# EAGLE board MicroMod_STM32_Processor-Panel (EAGLE 9.6.2), part 1 of 3
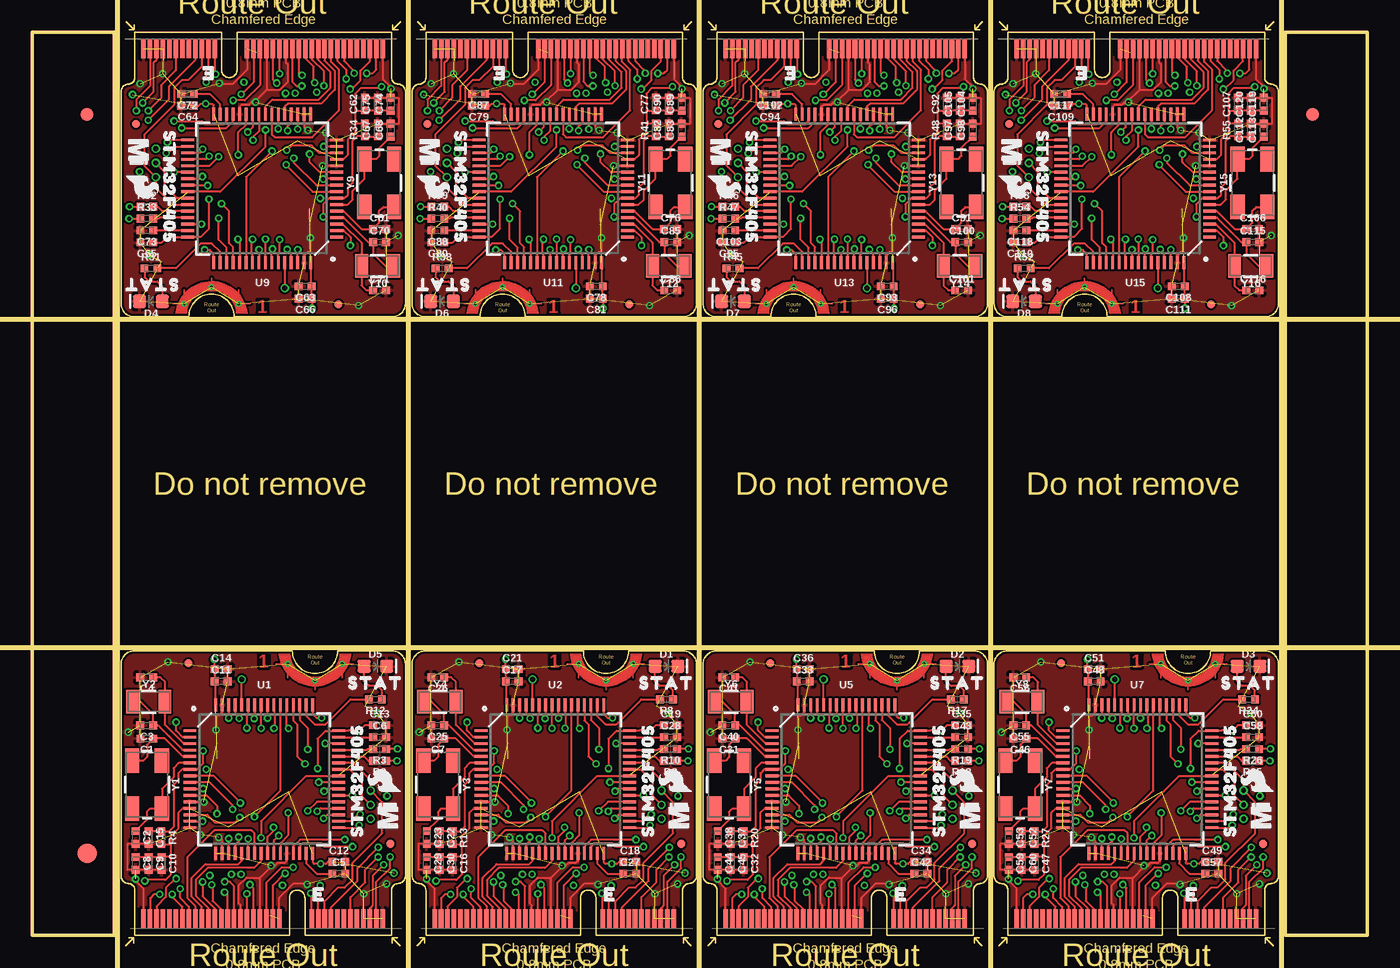
[diagram p0: board, top side]
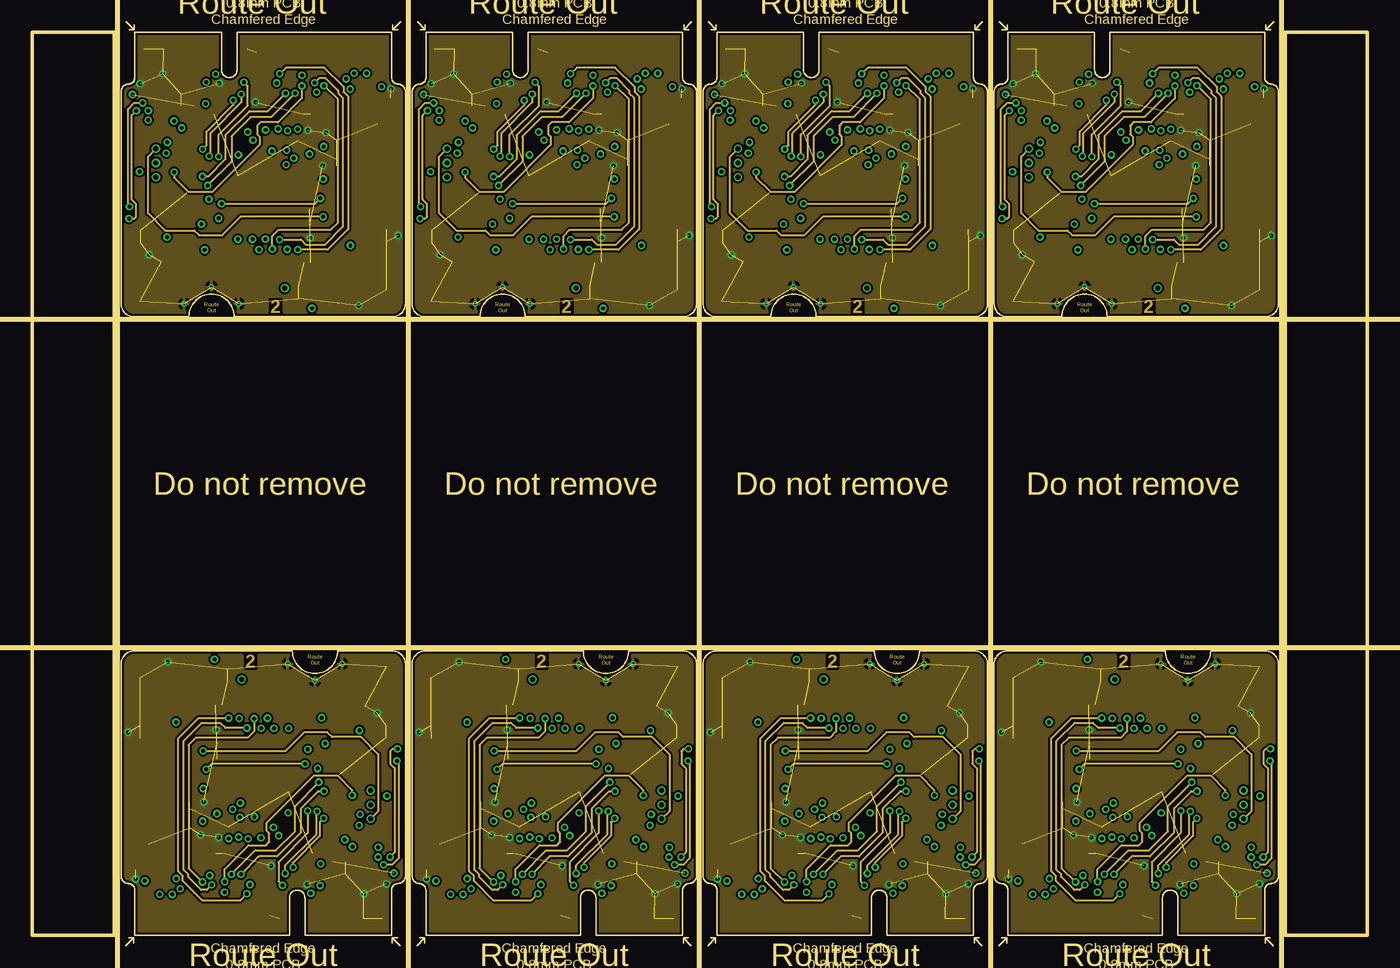
[diagram p1: board, inner layer Route2]
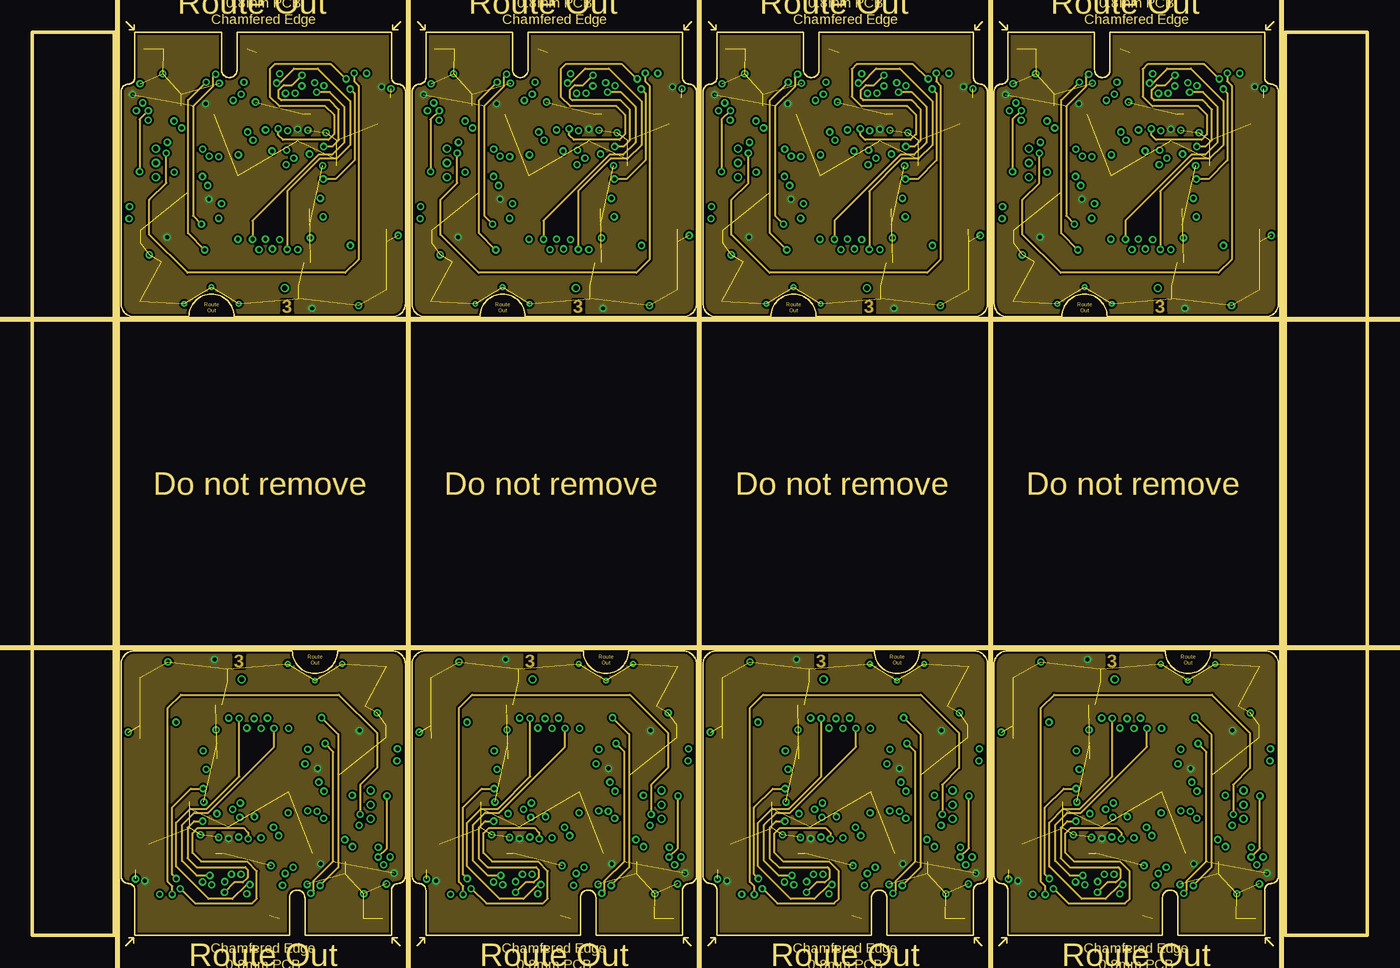
[diagram p2: board, inner layer Route15]
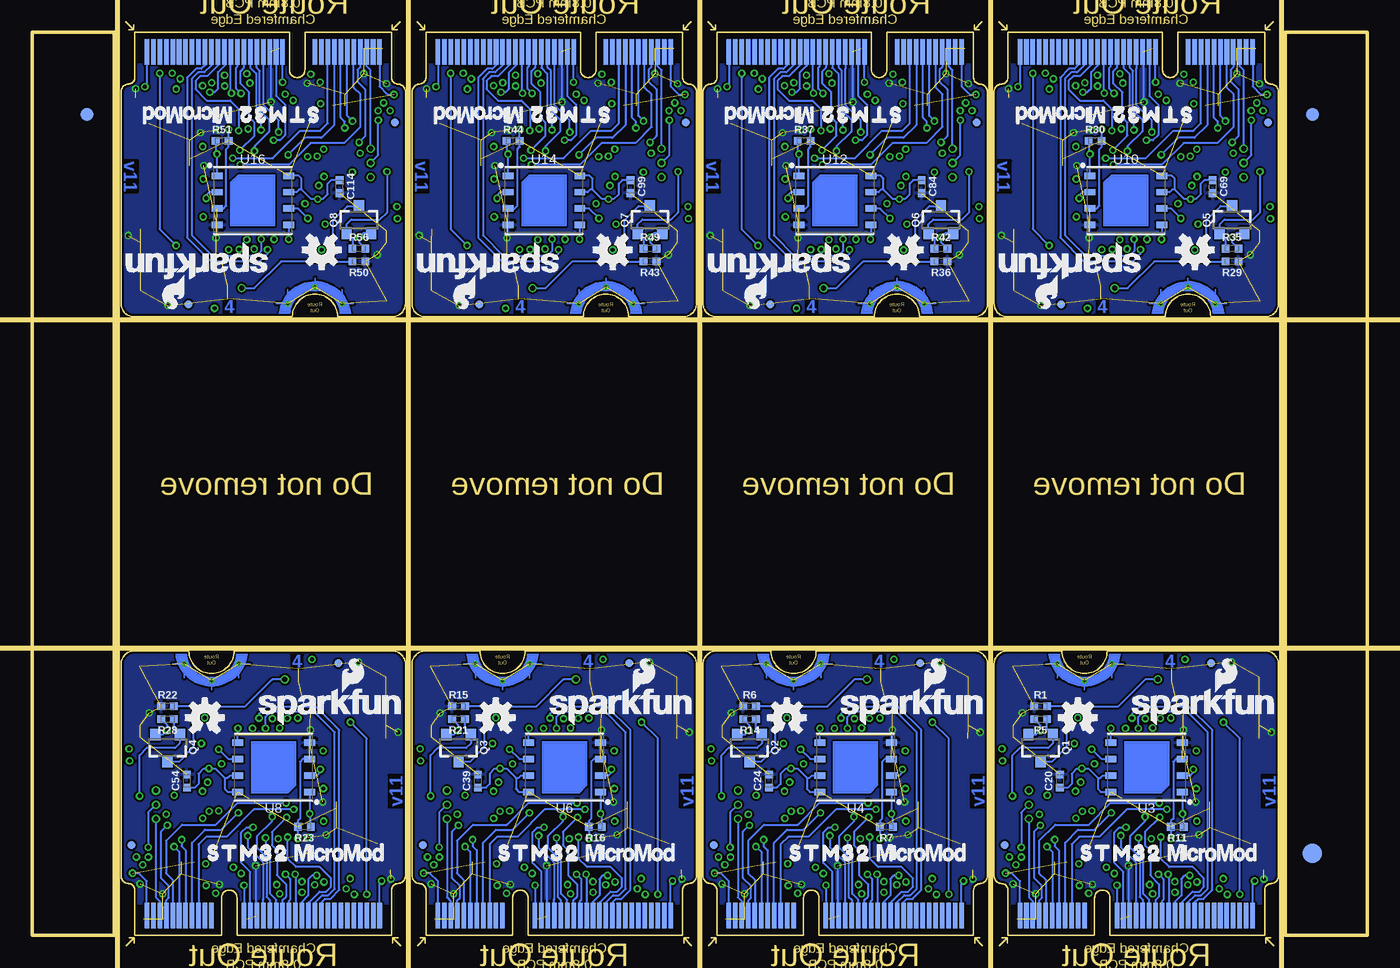
[diagram p3: board, bottom side, seen from below]

Size 103.24 x 69.85 mm. Coordinates in mm from the lower left corner, seen from the top.
Outline: 160 segments
Copper layers (1*2*15*16): Top 0.035559375mm / dielectric 0.47751875mm / Route2 0.035559375mm / dielectric 0.47751875mm / Route15 0.035559375mm / dielectric 0.47751875mm / Bottom 0.035559375mm
Design rules "MicroMod_STM32_Processor": minimum track width 4mil, minimum drill 6mil, track to track 5mil, track to pad 5mil, pad to pad 5mil, via to via 5mil, smd to smd 5mil, copper to edge 4mil, drill to drill 4mil, minimum pad ring 5mil, minimum via ring 5mil, stop-mask expansion 4mil, vias tented up to drill 25mil, thermal gap 10mil
tRestrict: area 11.4,10.3 to 11.6,10.5; area 13.9,6.3 to 14,6.4; area 13.8,7.1 to 13.9,7.5; area 33.9,10.3 to 34.1,10.5; area 36.4,6.3 to 36.5,6.4; area 36.3,7.1 to 36.4,7.5; area 56.4,10.3 to 56.6,10.5; area 58.9,6.3 to 59,6.4; area 58.8,7.1 to 58.9,7.5; area 78.9,10.3 to 79.1,10.5; area 81.4,6.3 to 81.5,6.4; area 81.3,7.1 to 81.4,7.5; 12 more areas
Milling: 7 lines

## Footprints (pad centres in the part's own frame; a part is rotated, then mirrored left to right if it is on the bottom)
0402-TIGHT = smd 0.6 x 0.6: 1 -0.5,0; 2 0.5,0
LED-0603 = smd 1 x 1: A -0.877,0; C 0.877,0
FIDUCIAL-1X2 = smd 1 x 1: 1 0,0
FIDUCIAL-1.5X3 = smd 1.5 x 1.5: 1 0,0
FIDUCIAL-MICRO = smd 0.635 x 0.635: 1 0,0
M.2-CARD-E-22 = smd 0.35 x 1.45: 1 9.25,1.275; 3 8.75,1.275; 5 8.25,1.275; 7 7.75,1.275; 9 7.25,1.275; 11 6.75,1.275; 13 6.25,1.275; 15 5.75,1.275; 17 5.25,1.275; 19 4.75,1.275; 21 4.25,1.275; 23 3.75,1.275; 33 1.25,1.275; 35 0.75,1.275; 37 0.25,1.275; 39 -0.25,1.275; 41 -0.75,1.275; 43 -1.25,1.275; 45 -1.75,1.275; 47 -2.25,1.275; 49 -2.75,1.275; 51 -3.25,1.275; 53 -3.75,1.275; 55 -4.25,1.275; 57 -4.75,1.275; 59 -5.25,1.275; 61 -5.75,1.275; 63 -6.25,1.275; 65 -6.75,1.275; 67 -7.25,1.275; 69 -7.75,1.275; 71 -8.25,1.275; 73 -8.75,1.275; 75 -9.25,1.275 | smd 0.35 x 1.95 bottom: 2 9,1.525; 4 8.5,1.525; 6 8,1.525; 8 7.5,1.525; 10 7,1.525; 12 6.5,1.525; 14 6,1.525; 16 5.5,1.525; 18 5,1.525; 20 4.5,1.525; 22 4,1.525; 32 1.5,1.525; 34 1,1.525; 36 0.5,1.525; 38 0,1.525; 40 -0.5,1.525; 42 -1,1.525; 44 -1.5,1.525; 46 -2,1.525; 48 -2.5,1.525; 50 -3,1.525; 52 -3.5,1.525; 54 -4,1.525; 56 -4.5,1.525; 58 -5,1.525; 60 -5.5,1.525; 62 -6,1.525; 64 -6.5,1.525; 66 -7,1.525; 68 -7.5,1.525; 70 -8,1.525; 72 -8.5,1.525; 74 -9,1.525 | drill 0.2: GND1 1.9,21; GND2 4,19.7; GND3 6.1,21
SOT23-3 = smd 0.8 x 0.9: 1 -0.95,-1; 2 0.95,-1; 3 0,1.1
TP_15TH = drill 0.381 pad 0.61: 1 0,0
TQFP64 = smd 0.22 x 1: 1 -3.75,-5.75; 2 -3.25,-5.75; 3 -2.75,-5.75; 4 -2.25,-5.75; 5 -1.75,-5.75; 6 -1.25,-5.75; 7 -0.75,-5.75; 8 -0.25,-5.75; 9 0.25,-5.75; 10 0.75,-5.75; 11 1.25,-5.75; 12 1.75,-5.75; 13 2.25,-5.75; 14 2.75,-5.75; 15 3.25,-5.75; 16 3.75,-5.75; 33 3.75,5.75; 34 3.25,5.75; 35 2.75,5.75; 36 2.25,5.75; 37 1.75,5.75; 38 1.25,5.75; 39 0.75,5.75; 40 0.25,5.75; 41 -0.25,5.75; 42 -0.75,5.75; 43 -1.25,5.75; 44 -1.75,5.75; 45 -2.25,5.75; 46 -2.75,5.75; 47 -3.25,5.75; 48 -3.75,5.75 | smd 1 x 0.22: 17 5.75,-3.75; 18 5.75,-3.25; 19 5.75,-2.75; 20 5.75,-2.25; 21 5.75,-1.75; 22 5.75,-1.25; 23 5.75,-0.75; 24 5.75,-0.25; 25 5.75,0.25; 26 5.75,0.75; 27 5.75,1.25; 28 5.75,1.75; 29 5.75,2.25; 30 5.75,2.75; 31 5.75,3.25; 32 5.75,3.75; 49 -5.75,3.75; 50 -5.75,3.25; 51 -5.75,2.75; 52 -5.75,2.25; 53 -5.75,1.75; 54 -5.75,1.25; 55 -5.75,0.75; 56 -5.75,0.25; 57 -5.75,-0.25; 58 -5.75,-0.75; 59 -5.75,-1.25; 60 -5.75,-1.75; 61 -5.75,-2.25; 62 -5.75,-2.75; 63 -5.75,-3.25; 64 -5.75,-3.75
WSON-8-6X5 = smd 0.85 x 0.5: 1 -2.775,1.905; 2 -2.775,0.635; 3 -2.775,-0.635; 4 -2.775,-1.905; 5 2.775,-1.905; 6 2.775,-0.635; 7 2.775,0.635; 8 2.775,1.905
CRYSTAL-SMD-5X3.2-4PAD = smd 1.9 x 1.1: 1 -1.85,-1.15; 2 1.85,-1.15; 3 1.85,1.15; 4 -1.85,1.15
CRYSTAL-SMD-3.2X1.5MM = smd 1 x 1.8: P$1 -1.25,0; P$2 1.25,0

## Placement (x,y rotation side)
C1  22pF  [0402-TIGHT]  8.86,15.22 180 top
C2  22pF  [0402-TIGHT]  8,7.57 270 top
C3  15pF  [0402-TIGHT]  8.85,16.23 180 top
C4  15pF  [0402-TIGHT]  8.85,19.95 180 top
C5  2.2uF  [0402-TIGHT]  23.71,4.77 0 top
C6  2.2uF  [0402-TIGHT]  26.86,15.33 0 top
C7  22pF  [0402-TIGHT]  31.36,15.22 180 top
C8  0.1uF  [0402-TIGHT]  8,5.56 270 top
C9  1.0uF  [0402-TIGHT]  9,5.56 270 top
C10  4.7uF  [0402-TIGHT]  10,5.55 270 top
C11  0.1uF  [0402-TIGHT]  14.61,19.65 0 top
C12  0.1uF  [0402-TIGHT]  23.71,5.68 0 top
C13  0.1uF  [0402-TIGHT]  26.86,16.25 0 top
C14  0.1uF  [0402-TIGHT]  14.61,20.59 0 top
C15  0.1uF  [0402-TIGHT]  9,7.56 270 top
C16  4.7uF  [0402-TIGHT]  32.5,5.55 270 top
C17  0.1uF  [0402-TIGHT]  37.11,19.65 0 top
C18  0.1uF  [0402-TIGHT]  46.21,5.68 0 top
C19  0.1uF  [0402-TIGHT]  49.36,16.25 0 top
C20  0.1uF  [0402-TIGHT]  23.76,11.93 90 bottom
C21  0.1uF  [0402-TIGHT]  37.11,20.59 0 top
C22  0.1uF  [0402-TIGHT]  31.5,7.56 270 top
C23  22pF  [0402-TIGHT]  30.5,7.57 270 top
C24  0.1uF  [0402-TIGHT]  46.27,11.93 90 bottom
C25  15pF  [0402-TIGHT]  31.35,16.23 180 top
C26  15pF  [0402-TIGHT]  31.35,19.95 180 top
C27  2.2uF  [0402-TIGHT]  46.21,4.77 0 top
C28  2.2uF  [0402-TIGHT]  49.36,15.33 0 top
C29  0.1uF  [0402-TIGHT]  30.5,5.56 270 top
C30  1.0uF  [0402-TIGHT]  31.5,5.56 270 top
C31  22pF  [0402-TIGHT]  53.87,15.22 180 top
C32  4.7uF  [0402-TIGHT]  55.01,5.55 270 top
C33  0.1uF  [0402-TIGHT]  59.62,19.65 0 top
C34  0.1uF  [0402-TIGHT]  68.72,5.68 0 top
C35  0.1uF  [0402-TIGHT]  71.87,16.25 0 top
C36  0.1uF  [0402-TIGHT]  59.62,20.59 0 top
C37  0.1uF  [0402-TIGHT]  54.01,7.56 270 top
C38  22pF  [0402-TIGHT]  53.01,7.57 270 top
C39  0.1uF  [0402-TIGHT]  68.78,11.93 90 bottom
C40  15pF  [0402-TIGHT]  53.86,16.23 180 top
C41  15pF  [0402-TIGHT]  53.86,19.95 180 top
C42  2.2uF  [0402-TIGHT]  68.72,4.77 0 top
C43  2.2uF  [0402-TIGHT]  71.87,15.33 0 top
C44  0.1uF  [0402-TIGHT]  53.01,5.56 270 top
C45  1.0uF  [0402-TIGHT]  54.01,5.56 270 top
C46  22pF  [0402-TIGHT]  76.38,15.22 180 top
C47  4.7uF  [0402-TIGHT]  77.52,5.55 270 top
C48  0.1uF  [0402-TIGHT]  82.13,19.65 0 top
C49  0.1uF  [0402-TIGHT]  91.23,5.68 0 top
C50  0.1uF  [0402-TIGHT]  94.38,16.25 0 top
C51  0.1uF  [0402-TIGHT]  82.13,20.59 0 top
C52  0.1uF  [0402-TIGHT]  76.52,7.56 270 top
C53  22pF  [0402-TIGHT]  75.52,7.57 270 top
C54  0.1uF  [0402-TIGHT]  91.29,11.93 90 bottom
C55  15pF  [0402-TIGHT]  76.37,16.23 180 top
C56  15pF  [0402-TIGHT]  76.37,19.95 180 top
C57  2.2uF  [0402-TIGHT]  91.23,4.77 0 top
C58  2.2uF  [0402-TIGHT]  94.38,15.33 0 top
C59  0.1uF  [0402-TIGHT]  75.52,5.56 270 top
C60  1.0uF  [0402-TIGHT]  76.52,5.56 270 top
C61  22pF  [0402-TIGHT]  26.86,54.63 0 top
C62  4.7uF  [0402-TIGHT]  25.72,64.3 90 top
C63  0.1uF  [0402-TIGHT]  21.11,50.2 180 top
C64  0.1uF  [0402-TIGHT]  12.01,64.17 180 top
C65  0.1uF  [0402-TIGHT]  8.86,53.6 180 top
C66  0.1uF  [0402-TIGHT]  21.11,49.26 180 top
C67  0.1uF  [0402-TIGHT]  26.72,62.29 90 top
C68  22pF  [0402-TIGHT]  27.72,62.28 90 top
C69  0.1uF  [0402-TIGHT]  11.95,57.92 270 bottom
C70  15pF  [0402-TIGHT]  26.87,53.62 0 top
C71  15pF  [0402-TIGHT]  26.87,49.9 0 top
C72  2.2uF  [0402-TIGHT]  12.01,65.08 180 top
C73  2.2uF  [0402-TIGHT]  8.86,54.52 180 top
C74  0.1uF  [0402-TIGHT]  27.72,64.29 90 top
C75  1.0uF  [0402-TIGHT]  26.72,64.29 90 top
C76  22pF  [0402-TIGHT]  49.37,54.63 0 top
C77  4.7uF  [0402-TIGHT]  48.23,64.3 90 top
C78  0.1uF  [0402-TIGHT]  43.62,50.2 180 top
C79  0.1uF  [0402-TIGHT]  34.52,64.17 180 top
C80  0.1uF  [0402-TIGHT]  31.37,53.6 180 top
C81  0.1uF  [0402-TIGHT]  43.62,49.26 180 top
C82  0.1uF  [0402-TIGHT]  49.23,62.29 90 top
C83  22pF  [0402-TIGHT]  50.23,62.28 90 top
C84  0.1uF  [0402-TIGHT]  34.46,57.92 270 bottom
C85  15pF  [0402-TIGHT]  49.38,53.62 0 top
C86  15pF  [0402-TIGHT]  49.38,49.9 0 top
C87  2.2uF  [0402-TIGHT]  34.52,65.08 180 top
C88  2.2uF  [0402-TIGHT]  31.37,54.52 180 top
C89  0.1uF  [0402-TIGHT]  50.23,64.29 90 top
C90  1.0uF  [0402-TIGHT]  49.23,64.29 90 top
C91  22pF  [0402-TIGHT]  71.87,54.63 0 top
C92  4.7uF  [0402-TIGHT]  70.73,64.3 90 top
C93  0.1uF  [0402-TIGHT]  66.12,50.2 180 top
C94  0.1uF  [0402-TIGHT]  57.02,64.17 180 top
C95  0.1uF  [0402-TIGHT]  53.87,53.6 180 top
C96  0.1uF  [0402-TIGHT]  66.12,49.26 180 top
C97  0.1uF  [0402-TIGHT]  71.73,62.29 90 top
C98  22pF  [0402-TIGHT]  72.73,62.28 90 top
C99  0.1uF  [0402-TIGHT]  56.97,57.92 270 bottom
C100  15pF  [0402-TIGHT]  71.88,53.62 0 top
C101  15pF  [0402-TIGHT]  71.88,49.9 0 top
C102  2.2uF  [0402-TIGHT]  57.02,65.08 180 top
C103  2.2uF  [0402-TIGHT]  53.87,54.52 180 top
C104  0.1uF  [0402-TIGHT]  72.73,64.29 90 top
C105  1.0uF  [0402-TIGHT]  71.73,64.29 90 top
C106  22pF  [0402-TIGHT]  94.38,54.63 0 top
C107  4.7uF  [0402-TIGHT]  93.24,64.3 90 top
C108  0.1uF  [0402-TIGHT]  88.63,50.2 180 top
C109  0.1uF  [0402-TIGHT]  79.53,64.17 180 top
C110  0.1uF  [0402-TIGHT]  76.38,53.6 180 top
C111  0.1uF  [0402-TIGHT]  88.63,49.26 180 top
C112  0.1uF  [0402-TIGHT]  94.24,62.29 90 top
C113  22pF  [0402-TIGHT]  95.24,62.28 90 top
C114  0.1uF  [0402-TIGHT]  79.48,57.92 270 bottom
C115  15pF  [0402-TIGHT]  94.39,53.62 0 top
C116  15pF  [0402-TIGHT]  94.39,49.9 0 top
C117  2.2uF  [0402-TIGHT]  79.53,65.08 180 top
C118  2.2uF  [0402-TIGHT]  76.38,54.52 180 top
C119  0.1uF  [0402-TIGHT]  95.24,64.29 90 top
C120  1.0uF  [0402-TIGHT]  94.24,64.29 90 top
D1  BLUE  [LED-0603]  49.04,20.81 0 top
D2  BLUE  [LED-0603]  71.55,20.81 0 top
D3  BLUE  [LED-0603]  94.06,20.81 0 top
D4  BLUE  [LED-0603]  9.18,49.04 180 top
D5  BLUE  [LED-0603]  26.54,20.81 0 top
D6  BLUE  [LED-0603]  31.69,49.04 180 top
D7  BLUE  [LED-0603]  54.19,49.04 180 top
D8  BLUE  [LED-0603]  76.7,49.04 180 top
E$1  [FIDUCIAL-1X2]  4.23,63.5 0 top
E$2  [FIDUCIAL-1X2]  4.23,63.5 0 bottom
E$3  [FIDUCIAL-1X2]  99.01,63.5 0 top
E$4  [FIDUCIAL-1X2]  99.01,63.5 0 bottom
E$5  [FIDUCIAL-1.5X3]  4.23,6.35 0 top
E$6  [FIDUCIAL-1.5X3]  4.23,6.35 0 bottom
FD1  FIDUCIALUFIDUCIAL  [FIDUCIAL-MICRO]  27.68,7.08 0 top
FD2  FIDUCIALUFIDUCIAL  [FIDUCIAL-MICRO]  12.06,21.04 0 bottom
FD3  FIDUCIALUFIDUCIAL  [FIDUCIAL-MICRO]  28.04,6.97 0 bottom
FD4  FIDUCIALUFIDUCIAL  [FIDUCIAL-MICRO]  12.06,21.04 0 top
FD5  FIDUCIALUFIDUCIAL  [FIDUCIAL-MICRO]  50.19,7.08 0 top
FD6  FIDUCIALUFIDUCIAL  [FIDUCIAL-MICRO]  34.56,21.04 0 bottom
FD7  FIDUCIALUFIDUCIAL  [FIDUCIAL-MICRO]  50.54,6.97 0 bottom
FD8  FIDUCIALUFIDUCIAL  [FIDUCIAL-MICRO]  34.56,21.04 0 top
FD9  FIDUCIALUFIDUCIAL  [FIDUCIAL-MICRO]  72.7,7.08 0 top
FD10  FIDUCIALUFIDUCIAL  [FIDUCIAL-MICRO]  57.07,21.04 0 bottom
FD11  FIDUCIALUFIDUCIAL  [FIDUCIAL-MICRO]  73.05,6.97 0 bottom
FD12  FIDUCIALUFIDUCIAL  [FIDUCIAL-MICRO]  57.07,21.04 0 top
FD13  FIDUCIALUFIDUCIAL  [FIDUCIAL-MICRO]  95.21,7.08 0 top
FD14  FIDUCIALUFIDUCIAL  [FIDUCIAL-MICRO]  79.58,21.04 0 bottom
FD15  FIDUCIALUFIDUCIAL  [FIDUCIAL-MICRO]  95.56,6.97 0 bottom
FD16  FIDUCIALUFIDUCIAL  [FIDUCIAL-MICRO]  79.58,21.04 0 top
FD17  FIDUCIALUFIDUCIAL  [FIDUCIAL-MICRO]  8.03,62.77 180 top
FD18  FIDUCIALUFIDUCIAL  [FIDUCIAL-MICRO]  23.66,48.81 180 bottom
FD19  FIDUCIALUFIDUCIAL  [FIDUCIAL-MICRO]  7.68,62.88 180 bottom
FD20  FIDUCIALUFIDUCIAL  [FIDUCIAL-MICRO]  23.66,48.81 180 top
FD21  FIDUCIALUFIDUCIAL  [FIDUCIAL-MICRO]  30.54,62.77 180 top
FD22  FIDUCIALUFIDUCIAL  [FIDUCIAL-MICRO]  46.17,48.81 180 bottom
FD23  FIDUCIALUFIDUCIAL  [FIDUCIAL-MICRO]  30.19,62.88 180 bottom
FD24  FIDUCIALUFIDUCIAL  [FIDUCIAL-MICRO]  46.17,48.81 180 top
FD25  FIDUCIALUFIDUCIAL  [FIDUCIAL-MICRO]  53.05,62.77 180 top
FD26  FIDUCIALUFIDUCIAL  [FIDUCIAL-MICRO]  68.67,48.81 180 bottom
FD27  FIDUCIALUFIDUCIAL  [FIDUCIAL-MICRO]  52.69,62.88 180 bottom
FD28  FIDUCIALUFIDUCIAL  [FIDUCIAL-MICRO]  68.67,48.81 180 top
FD29  FIDUCIALUFIDUCIAL  [FIDUCIAL-MICRO]  75.56,62.77 180 top
FD30  FIDUCIALUFIDUCIAL  [FIDUCIAL-MICRO]  91.18,48.81 180 bottom
FD31  FIDUCIALUFIDUCIAL  [FIDUCIAL-MICRO]  75.2,62.88 180 bottom
FD32  FIDUCIALUFIDUCIAL  [FIDUCIAL-MICRO]  91.18,48.81 180 top
J1  MICROMOD-2222  [M.2-CARD-E-22]  17.86,0 0 top
J2  MICROMOD-2222  [M.2-CARD-E-22]  40.36,0 0 top
J3  MICROMOD-2222  [M.2-CARD-E-22]  62.87,0 0 top
J4  MICROMOD-2222  [M.2-CARD-E-22]  85.38,0 0 top
J5  MICROMOD-2222  [M.2-CARD-E-22]  17.86,69.85 180 top
J6  MICROMOD-2222  [M.2-CARD-E-22]  40.37,69.85 180 top
J7  MICROMOD-2222  [M.2-CARD-E-22]  62.87,69.85 180 top
J8  MICROMOD-2222  [M.2-CARD-E-22]  85.38,69.85 180 top
LOGO1  OSHW-LOGOS  [OSHW-LOGO-S]  44.88,16.83 0 bottom
LOGO2  OSHW-LOGOS  [OSHW-LOGO-S]  22.38,16.83 0 bottom
LOGO3  SFE_LOGO_NAME_FLAME.1_INCH  [SFE_LOGO_NAME_FLAME_.1]  12.64,17.71 0 bottom
LOGO4  SFE_LOGO_NAME_FLAME.1_INCH  [SFE_LOGO_NAME_FLAME_.1]  35.14,17.71 0 bottom
LOGO5  OSHW-LOGOS  [OSHW-LOGO-S]  67.39,16.83 0 bottom
LOGO6  SFE_LOGO_NAME_FLAME.1_INCH  [SFE_LOGO_NAME_FLAME_.1]  57.65,17.71 0 bottom
LOGO7  OSHW-LOGOS  [OSHW-LOGO-S]  89.9,16.83 0 bottom
LOGO8  SFE_LOGO_NAME_FLAME.1_INCH  [SFE_LOGO_NAME_FLAME_.1]  80.16,17.71 0 bottom
LOGO9  OSHW-LOGOS  [OSHW-LOGO-S]  13.34,53.02 180 bottom
LOGO10  SFE_LOGO_NAME_FLAME.1_INCH  [SFE_LOGO_NAME_FLAME_.1]  23.08,52.14 180 bottom
LOGO11  OSHW-LOGOS  [OSHW-LOGO-S]  35.85,53.02 180 bottom
LOGO12  SFE_LOGO_NAME_FLAME.1_INCH  [SFE_LOGO_NAME_FLAME_.1]  45.59,52.14 180 bottom
LOGO13  OSHW-LOGOS  [OSHW-LOGO-S]  58.35,53.02 180 bottom
LOGO14  SFE_LOGO_NAME_FLAME.1_INCH  [SFE_LOGO_NAME_FLAME_.1]  68.09,52.14 180 bottom
LOGO15  OSHW-LOGOS  [OSHW-LOGO-S]  80.86,53.02 180 bottom
LOGO16  SFE_LOGO_NAME_FLAME.1_INCH  [SFE_LOGO_NAME_FLAME_.1]  90.6,52.14 180 bottom
Q1  [SOT23-3]  25.26,14.53 180 bottom
Q2  [SOT23-3]  47.76,14.53 180 bottom
Q3  [SOT23-3]  70.27,14.53 180 bottom
Q4  [SOT23-3]  92.78,14.53 180 bottom
Q5  [SOT23-3]  10.46,55.32 0 bottom
Q6  [SOT23-3]  32.97,55.32 0 bottom
Q7  [SOT23-3]  55.47,55.32 0 bottom
Q8  [SOT23-3]  77.98,55.32 0 bottom
R1  100k  [0402-TIGHT]  25.26,17.72 0 bottom
R2  22  [0402-TIGHT]  26.86,13.49 180 top
R3  22  [0402-TIGHT]  26.86,14.41 180 top
R4  5.1k  [0402-TIGHT]  9.99,7.55 270 top
R5  100k  [0402-TIGHT]  25.26,16.73 180 bottom
R6  100k  [0402-TIGHT]  47.76,17.72 0 bottom
R7  100k  [0402-TIGHT]  37.18,8.4 180 bottom
R8  1k  [0402-TIGHT]  49.04,18.25 180 top
R9  22  [0402-TIGHT]  49.36,13.49 180 top
R10  22  [0402-TIGHT]  49.36,14.41 180 top
R11  100k  [0402-TIGHT]  14.68,8.4 180 bottom
R12  1k  [0402-TIGHT]  26.54,18.25 180 top
R13  5.1k  [0402-TIGHT]  32.49,7.55 270 top
R14  100k  [0402-TIGHT]  47.76,16.73 180 bottom
R15  100k  [0402-TIGHT]  70.27,17.72 0 bottom
R16  100k  [0402-TIGHT]  59.69,8.4 180 bottom
R17  1k  [0402-TIGHT]  71.55,18.25 180 top
R18  22  [0402-TIGHT]  71.87,13.49 180 top
R19  22  [0402-TIGHT]  71.87,14.41 180 top
R20  5.1k  [0402-TIGHT]  55,7.55 270 top
R21  100k  [0402-TIGHT]  70.27,16.73 180 bottom
R22  100k  [0402-TIGHT]  92.78,17.72 0 bottom
R23  100k  [0402-TIGHT]  82.2,8.4 180 bottom
R24  1k  [0402-TIGHT]  94.06,18.25 180 top
R25  22  [0402-TIGHT]  94.38,13.49 180 top
R26  22  [0402-TIGHT]  94.38,14.41 180 top
R27  5.1k  [0402-TIGHT]  77.51,7.55 270 top
R28  100k  [0402-TIGHT]  92.78,16.73 180 bottom
R29  100k  [0402-TIGHT]  10.46,52.13 180 bottom
R30  100k  [0402-TIGHT]  21.04,61.45 0 bottom
R31  1k  [0402-TIGHT]  9.18,51.6 0 top
R32  22  [0402-TIGHT]  8.86,56.36 0 top
R33  22  [0402-TIGHT]  8.86,55.44 0 top
R34  5.1k  [0402-TIGHT]  25.73,62.3 90 top
R35  100k  [0402-TIGHT]  10.46,53.12 0 bottom
R36  100k  [0402-TIGHT]  32.97,52.13 180 bottom
R37  100k  [0402-TIGHT]  43.55,61.45 0 bottom
R38  1k  [0402-TIGHT]  31.69,51.6 0 top
R39  22  [0402-TIGHT]  31.37,56.36 0 top
R40  22  [0402-TIGHT]  31.37,55.44 0 top
R41  5.1k  [0402-TIGHT]  48.24,62.3 90 top
R42  100k  [0402-TIGHT]  32.97,53.12 0 bottom
R43  100k  [0402-TIGHT]  55.47,52.13 180 bottom
R44  100k  [0402-TIGHT]  66.05,61.45 0 bottom
R45  1k  [0402-TIGHT]  54.19,51.6 0 top
R46  22  [0402-TIGHT]  53.87,56.36 0 top
R47  22  [0402-TIGHT]  53.87,55.44 0 top
R48  5.1k  [0402-TIGHT]  70.74,62.3 90 top
R49  100k  [0402-TIGHT]  55.47,53.12 0 bottom
R50  100k  [0402-TIGHT]  77.98,52.13 180 bottom
R51  100k  [0402-TIGHT]  88.56,61.45 0 bottom
R52  1k  [0402-TIGHT]  76.7,51.6 0 top
R53  22  [0402-TIGHT]  76.38,56.36 0 top
R54  22  [0402-TIGHT]  76.38,55.44 0 top
R55  5.1k  [0402-TIGHT]  93.25,62.3 90 top
R56  100k  [0402-TIGHT]  77.98,53.12 0 bottom
TP1  TEST-POINTTP_15TH_THRU  [TP_15TH]  26.16,11.2 0 bottom
TP2  TEST-POINTTP_15TH_THRU  [TP_15TH]  26.16,10.1 0 bottom
TP3  TEST-POINTTP_15TH_THRU  [TP_15TH]  16.19,19.79 0 bottom
TP4  TEST-POINTTP_15TH_THRU  [TP_15TH]  26.16,9 0 bottom
TP5  TEST-POINTTP_15TH_THRU  [TP_15TH]  48.66,11.2 0 bottom
TP6  TEST-POINTTP_15TH_THRU  [TP_15TH]  48.66,10.1 0 bottom
TP7  TEST-POINTTP_15TH_THRU  [TP_15TH]  38.69,19.79 0 bottom
TP8  TEST-POINTTP_15TH_THRU  [TP_15TH]  48.66,9 0 bottom
TP9  TEST-POINTTP_15TH_THRU  [TP_15TH]  71.17,11.2 0 bottom
TP10  TEST-POINTTP_15TH_THRU  [TP_15TH]  71.17,10.1 0 bottom
TP11  TEST-POINTTP_15TH_THRU  [TP_15TH]  61.2,19.79 0 bottom
TP12  TEST-POINTTP_15TH_THRU  [TP_15TH]  71.17,9 0 bottom
TP13  TEST-POINTTP_15TH_THRU  [TP_15TH]  93.68,11.2 0 bottom
TP14  TEST-POINTTP_15TH_THRU  [TP_15TH]  93.68,10.1 0 bottom
TP15  TEST-POINTTP_15TH_THRU  [TP_15TH]  83.71,19.79 0 bottom
TP16  TEST-POINTTP_15TH_THRU  [TP_15TH]  93.68,9 0 bottom
TP17  TEST-POINTTP_15TH_THRU  [TP_15TH]  9.56,58.65 180 bottom
TP18  TEST-POINTTP_15TH_THRU  [TP_15TH]  9.56,59.75 180 bottom
TP19  TEST-POINTTP_15TH_THRU  [TP_15TH]  19.53,50.06 180 bottom
TP20  TEST-POINTTP_15TH_THRU  [TP_15TH]  9.56,60.85 180 bottom
TP21  TEST-POINTTP_15TH_THRU  [TP_15TH]  32.07,58.65 180 bottom
TP22  TEST-POINTTP_15TH_THRU  [TP_15TH]  32.07,59.75 180 bottom
TP23  TEST-POINTTP_15TH_THRU  [TP_15TH]  42.04,50.06 180 bottom
TP24  TEST-POINTTP_15TH_THRU  [TP_15TH]  32.07,60.85 180 bottom
TP25  TEST-POINTTP_15TH_THRU  [TP_15TH]  54.57,58.65 180 bottom
TP26  TEST-POINTTP_15TH_THRU  [TP_15TH]  54.57,59.75 180 bottom
TP27  TEST-POINTTP_15TH_THRU  [TP_15TH]  64.54,50.06 180 bottom
TP28  TEST-POINTTP_15TH_THRU  [TP_15TH]  54.57,60.85 180 bottom
TP29  TEST-POINTTP_15TH_THRU  [TP_15TH]  77.08,58.65 180 bottom
TP30  TEST-POINTTP_15TH_THRU  [TP_15TH]  77.08,59.75 180 bottom
TP31  TEST-POINTTP_15TH_THRU  [TP_15TH]  87.05,50.06 180 bottom
TP32  TEST-POINTTP_15TH_THRU  [TP_15TH]  77.08,60.85 180 bottom
U1  STM32F405RGT6  [TQFP64]  17.94,12.08 270 top
U2  STM32F405RGT6  [TQFP64]  40.44,12.08 270 top
U3  W25QXX128MBIT-6X5  [WSON-8-6X5]  17.06,13 180 bottom
U4  W25QXX128MBIT-6X5  [WSON-8-6X5]  39.56,13 180 bottom
U5  STM32F405RGT6  [TQFP64]  62.95,12.08 270 top
U6  W25QXX128MBIT-6X5  [WSON-8-6X5]  62.07,13 180 bottom
U7  STM32F405RGT6  [TQFP64]  85.46,12.08 270 top
U8  W25QXX128MBIT-6X5  [WSON-8-6X5]  84.58,13 180 bottom
U9  STM32F405RGT6  [TQFP64]  17.78,57.77 90 top
U10  W25QXX128MBIT-6X5  [WSON-8-6X5]  18.66,56.85 0 bottom
U11  STM32F405RGT6  [TQFP64]  40.29,57.77 90 top
U12  W25QXX128MBIT-6X5  [WSON-8-6X5]  41.17,56.85 0 bottom
U13  STM32F405RGT6  [TQFP64]  62.79,57.77 90 top
U14  W25QXX128MBIT-6X5  [WSON-8-6X5]  63.67,56.85 0 bottom
U15  STM32F405RGT6  [TQFP64]  85.3,57.77 90 top
U16  W25QXX128MBIT-6X5  [WSON-8-6X5]  86.18,56.85 0 bottom
U$1  [STAT0]  26.54,19.51 0 top
U$2  [STM320]  19.02,6.36 0 bottom
U$3  [MICROMOD_MI_LOGO_.35]  27.48,9.23 90 top
U$4  [STM32F4050]  25.12,11.99 90 top
U$5  [MICROMOD_LOGO_.3]  12.02,6.36 0 bottom
U$6  [SFE_LOGO_FLAME_.1]  27.18,11.95 90 top
U$7  [STAT0]  49.04,19.51 0 top
U$8  [STM320]  41.52,6.36 0 bottom
U$9  [MICROMOD_MI_LOGO_.35]  49.98,9.23 90 top
U$10  [STM32F4050]  47.62,11.99 90 top
U$11  [MICROMOD_LOGO_.3]  34.52,6.36 0 bottom
U$12  [SFE_LOGO_FLAME_.1]  49.68,11.95 90 top
U$13  [STAT0]  71.55,19.51 0 top
U$14  [STM320]  64.03,6.36 0 bottom
U$15  [MICROMOD_MI_LOGO_.35]  72.49,9.23 90 top
U$16  [STM32F4050]  70.13,11.99 90 top
U$17  [MICROMOD_LOGO_.3]  57.03,6.36 0 bottom
U$18  [SFE_LOGO_FLAME_.1]  72.19,11.95 90 top
U$19  [STAT0]  94.06,19.51 0 top
U$20  [STM320]  86.54,6.36 0 bottom
U$21  [MICROMOD_MI_LOGO_.35]  95,9.23 90 top
U$22  [STM32F4050]  92.64,11.99 90 top
U$23  [MICROMOD_LOGO_.3]  79.54,6.36 0 bottom
U$24  [SFE_LOGO_FLAME_.1]  94.7,11.95 90 top
U$25  [STAT0]  9.18,50.34 180 top
U$26  [STM320]  16.7,63.49 180 bottom
U$27  [MICROMOD_MI_LOGO_.35]  8.24,60.62 270 top
U$28  [STM32F4050]  10.6,57.86 270 top
U$29  [MICROMOD_LOGO_.3]  23.7,63.49 180 bottom
U$30  [SFE_LOGO_FLAME_.1]  8.54,57.9 270 top
U$31  [STAT0]  31.69,50.34 180 top
U$32  [STM320]  39.21,63.49 180 bottom
U$33  [MICROMOD_MI_LOGO_.35]  30.75,60.62 270 top
U$34  [STM32F4050]  33.11,57.86 270 top
U$35  [MICROMOD_LOGO_.3]  46.21,63.49 180 bottom
U$36  [SFE_LOGO_FLAME_.1]  31.05,57.9 270 top
U$37  [STAT0]  54.19,50.34 180 top
U$38  [STM320]  61.71,63.49 180 bottom
U$39  [MICROMOD_MI_LOGO_.35]  53.25,60.62 270 top
U$40  [STM32F4050]  55.61,57.86 270 top
U$41  [MICROMOD_LOGO_.3]  68.71,63.49 180 bottom
U$42  [SFE_LOGO_FLAME_.1]  53.55,57.9 270 top
U$43  [STAT0]  76.7,50.34 180 top
U$44  [STM320]  84.22,63.49 180 bottom
U$45  [MICROMOD_MI_LOGO_.35]  75.76,60.62 270 top
U$46  [STM32F4050]  78.12,57.86 270 top
U$47  [MICROMOD_LOGO_.3]  91.22,63.49 180 bottom
U$48  [SFE_LOGO_FLAME_.1]  76.06,57.9 270 top
Y1  12MHz  [CRYSTAL-SMD-5X3.2-4PAD]  8.88,11.66 270 top
Y2  32.768kHz  [CRYSTAL-SMD-3.2X1.5MM]  9.01,18.07 0 top
Y3  12MHz  [CRYSTAL-SMD-5X3.2-4PAD]  31.38,11.66 270 top
Y4  32.768kHz  [CRYSTAL-SMD-3.2X1.5MM]  31.51,18.07 0 top
Y5  12MHz  [CRYSTAL-SMD-5X3.2-4PAD]  53.89,11.66 270 top
Y6  32.768kHz  [CRYSTAL-SMD-3.2X1.5MM]  54.02,18.07 0 top
Y7  12MHz  [CRYSTAL-SMD-5X3.2-4PAD]  76.4,11.66 270 top
Y8  32.768kHz  [CRYSTAL-SMD-3.2X1.5MM]  76.53,18.07 0 top
Y9  12MHz  [CRYSTAL-SMD-5X3.2-4PAD]  26.84,58.19 90 top
Y10  32.768kHz  [CRYSTAL-SMD-3.2X1.5MM]  26.71,51.78 180 top
Y11  12MHz  [CRYSTAL-SMD-5X3.2-4PAD]  49.35,58.19 90 top
Y12  32.768kHz  [CRYSTAL-SMD-3.2X1.5MM]  49.22,51.78 180 top
Y13  12MHz  [CRYSTAL-SMD-5X3.2-4PAD]  71.85,58.19 90 top
Y14  32.768kHz  [CRYSTAL-SMD-3.2X1.5MM]  71.72,51.78 180 top
Y15  12MHz  [CRYSTAL-SMD-5X3.2-4PAD]  94.36,58.19 90 top
Y16  32.768kHz  [CRYSTAL-SMD-3.2X1.5MM]  94.23,51.78 180 top

## Library data of the parts
C1 C2 C7 C23 C31 C38 C46 C53 C61 C68 C76 C83 C91 C98 C106 C113 = SparkFun-Capacitors; PROD_ID: CAP-14674
C3 C4 C25 C26 C40 C41 C55 C56 C70 C71 C85 C86 C100 C101 C115 C116 = SparkFun-Capacitors; PROD_ID: CAP-13063
C5 C6 C27 C28 C42 C43 C57 C58 C72 C73 C87 C88 C102 C103 C117 C118 = SparkFun-Capacitors; PROD_ID: CAP-14232
C8 C29 C44 C59 C74 C89 C104 C119 = SparkFun-Capacitors; PROD_ID: CAP-15083; SPICEPREFIX: C
C9 C30 C45 C60 C75 C90 C105 C120 = SparkFun-Capacitors; PROD_ID: CAP-12417; SPICEPREFIX: C
C10 C16 C32 C47 C62 C77 C92 C107 = SparkFun-Capacitors; PROD_ID: CAP-14240; SPICEPREFIX: C
C11-C15 C17-C22 C24 C33-C37 C39 C48-C52 C54 C63-C67 C69 C78-C82 C84 C93-C97 C99 C108-C112 C114 = SparkFun-Capacitors; PROD_ID: CAP-15083
D1-D8 = SparkFun-LED; PROD_ID: DIO-08575
E$1-E$4 FD1-FD32 LOGO1-LOGO16 U$6 U$12 U$18 U$24 U$30 U$36 U$42 U$48 = SparkFun-Aesthetics
E$5 E$6 = SparkFun-Retired
J1-J8 U$3 U$5 U$9 U$11 U$15 U$17 U$21 U$23 U$27 U$29 U$33 U$35 U$39 U$41 U$45 U$47 = SparkFun-MicroMod
Q1-Q8 = SparkFun-DiscreteSemi; PROD_ID: TRAN-14388
R1 R5-R7 R11 R14-R16 R21-R23 R28-R30 R35-R37 R42-R44 R49-R51 R56 = SparkFun-Resistors; PROD_ID: RES-13495
R2 R3 R9 R10 R18 R19 R25 R26 R32 R33 R39 R40 R46 R47 R53 R54 = SparkFun-Resistors; PROD_ID: RES-12427
R4 R13 R20 R27 R34 R41 R48 R55 = SparkFun-Resistors; PROD_ID: RES-14340
R8 R12 R17 R24 R31 R38 R45 R52 = SparkFun-Resistors; PROD_ID: RES-14342
TP1-TP32 = SparkFun-Connectors
U1 U2 U5 U7 U9 U11 U13 U15 = SparkFun-IC-Microcontroller; PROD_ID: IC-11709
U3 U4 U6 U8 U10 U12 U14 U16 = SparkFun-MicroMod; PROD_ID: IC-15107
U$1 U$2 U$4 U$7 U$8 U$10 U$13 U$14 U$16 U$19 U$20 U$22 U$25 U$26 U$28 U$31 U$32 U$34 U$37 U$38 U$40 U$43 U$44 U$46 = output
Y1 Y3 Y5 Y7 Y9 Y11 Y13 Y15 = SparkFun-Clocks; PROD_ID: XTAL-08297
Y2 Y4 Y6 Y8 Y10 Y12 Y14 Y16 = SparkFun-Clocks; PROD_ID: XTAL-13062

## Nets
3.3V: C8.1 C9.1 C10.1 C11.1 C12.1 C13.1 C14.1 C20.1 J1.2 J1.74 Q1.2 R4.2 R5.2 R11.2 U1.13 U1.19 U1.32 U1.48 U1.64 U3.3 U3.7 U3.8
3.3V1: C16.1 C17.1 C18.1 C19.1 C21.1 C24.1 C29.1 C30.1 J2.2 J2.74 Q2.2 R7.2 R13.2 R14.2 U2.13 U2.19 U2.32 U2.48 U2.64 U4.3 U4.7 U4.8
3.3V2: C32.1 C33.1 C34.1 C35.1 C36.1 C39.1 C44.1 C45.1 J3.2 J3.74 Q3.2 R16.2 R20.2 R21.2 U5.13 U5.19 U5.32 U5.48 U5.64 U6.3 U6.7 U6.8
3.3V3: C47.1 C48.1 C49.1 C50.1 C51.1 C54.1 C59.1 C60.1 J4.2 J4.74 Q4.2 R23.2 R27.2 R28.2 U7.13 U7.19 U7.32 U7.48 U7.64 U8.3 U8.7 U8.8
3.3V4: C62.1 C63.1 C64.1 C65.1 C66.1 C69.1 C74.1 C75.1 J5.2 J5.74 Q5.2 R30.2 R34.2 R35.2 U9.13 U9.19 U9.32 U9.48 U9.64 U10.3 U10.7 U10.8
3.3V5: C77.1 C78.1 C79.1 C80.1 C81.1 C84.1 C89.1 C90.1 J6.2 J6.74 Q6.2 R37.2 R41.2 R42.2 U11.13 U11.19 U11.32 U11.48 U11.64 U12.3 U12.7 U12.8
3.3V6: C92.1 C93.1 C94.1 C95.1 C96.1 C99.1 C104.1 C105.1 J7.2 J7.74 Q7.2 R44.2 R48.2 R49.2 U13.13 U13.19 U13.32 U13.48 U13.64 U14.3 U14.7 U14.8
3.3V7: C107.1 C108.1 C109.1 C110.1 C111.1 C114.1 C119.1 C120.1 J8.2 J8.74 Q8.2 R51.2 R55.2 R56.2 U15.13 U15.19 U15.32 U15.48 U15.64 U16.3 U16.7 U16.8
!BOOT: J1.11 Q1.1 R5.1
!BOOT1: J2.11 Q2.1 R14.1
!BOOT2: J3.11 Q3.1 R21.1
!BOOT3: J4.11 Q4.1 R28.1
!BOOT4: J5.11 Q5.1 R35.1
!BOOT5: J6.11 Q6.1 R42.1
!BOOT6: J7.11 Q7.1 R49.1
!BOOT7: J8.11 Q8.1 R56.1
!CS: J1.55 U1.24
!CS1: J2.55 U2.24
!CS2: J3.55 U5.24
!CS3: J4.55 U7.24
!CS4: J5.55 U9.24
!CS5: J6.55 U11.24
!CS6: J7.55 U13.24
!CS7: J8.55 U15.24
!INT: J1.16 U1.27
!INT1: J2.16 U2.27
!INT2: J3.16 U5.27
!INT3: J4.16 U7.27
!INT4: J5.16 U9.27
!INT5: J6.16 U11.27
!INT6: J7.16 U13.27
!INT7: J8.16 U15.27
!RESET: C15.1 J1.6 R4.1 TP4.1 U1.7
!RESET1: C22.1 J2.6 R13.1 TP8.1 U2.7
!RESET2: C37.1 J3.6 R20.1 TP12.1 U5.7
!RESET3: C52.1 J4.6 R27.1 TP16.1 U7.7
!RESET4: C67.1 J5.6 R34.1 TP20.1 U9.7
!RESET5: C82.1 J6.6 R41.1 TP24.1 U11.7
!RESET6: C97.1 J7.6 R48.1 TP28.1 U13.7
!RESET7: C112.1 J8.6 R55.1 TP32.1 U15.7
A0: J1.34 U1.25
A1: J1.38 U1.26
A2: J2.34 U2.25
A3: J2.38 U2.26
A4: J3.34 U5.25
A5: J3.38 U5.26
A6: J4.34 U7.25
A7: J4.38 U7.26
A8: J5.34 U9.25
A9: J5.38 U9.26
A10: J6.34 U11.25
A11: J6.38 U11.26
A12: J7.34 U13.25
A13: J7.38 U13.26
A14: J8.34 U15.25
A15: J8.38 U15.26
AUD_BCLK: J1.50 U1.55
AUD_BCLK1: J2.50 U2.55
AUD_BCLK2: J3.50 U5.55
AUD_BCLK3: J4.50 U7.55
AUD_BCLK4: J5.50 U9.55
AUD_BCLK5: J6.50 U11.55
AUD_BCLK6: J7.50 U13.55
AUD_BCLK7: J8.50 U15.55
AUD_IN: J1.54 U1.57
AUD_IN1: J2.54 U2.57
AUD_IN2: J3.54 U5.57
AUD_IN3: J4.54 U7.57
AUD_IN4: J5.54 U9.57
AUD_IN5: J6.54 U11.57
AUD_IN6: J7.54 U13.57
AUD_IN7: J8.54 U15.57
AUD_LRCLK: J1.52 U1.20
AUD_LRCLK1: J2.52 U2.20
AUD_LRCLK2: J3.52 U5.20
AUD_LRCLK3: J4.52 U7.20
AUD_LRCLK4: J5.52 U9.20
AUD_LRCLK5: J6.52 U11.20
AUD_LRCLK6: J7.52 U13.20
AUD_LRCLK7: J8.52 U15.20
AUD_OUT: J1.56 U1.56
AUD_OUT1: J2.56 U2.56
AUD_OUT2: J3.56 U5.56
AUD_OUT3: J4.56 U7.56
AUD_OUT4: J5.56 U9.56
AUD_OUT5: J6.56 U11.56
AUD_OUT6: J7.56 U13.56
AUD_OUT7: J8.56 U15.56
BATT_VIN: J1.49 U1.15
BATT_VIN1: J2.49 U2.15
BATT_VIN2: J3.49 U5.15
BATT_VIN3: J4.49 U7.15
BATT_VIN4: J5.49 U9.15
BATT_VIN5: J6.49 U11.15
BATT_VIN6: J7.49 U13.15
BATT_VIN7: J8.49 U15.15
BOOT0: Q1.3 R1.2 TP3.1 U1.60
BOOT1: Q2.3 R6.2 TP7.1 U2.60
BOOT2: Q3.3 R15.2 TP11.1 U5.60
BOOT3: Q4.3 R22.2 TP15.1 U7.60
BOOT4: Q5.3 R29.2 TP19.1 U9.60
BOOT5: Q6.3 R36.2 TP23.1 U11.60
BOOT6: Q7.3 R43.2 TP27.1 U13.60
BOOT7: Q8.3 R50.2 TP31.1 U15.60
CAN_RX: J1.41 U1.61
CAN_RX1: J2.41 U2.61
CAN_RX2: J3.41 U5.61
CAN_RX3: J4.41 U7.61
CAN_RX4: J5.41 U9.61
CAN_RX5: J6.41 U11.61
CAN_RX6: J7.41 U13.61
CAN_RX7: J8.41 U15.61
CAN_TX: J1.43 U1.62
CAN_TX1: J2.43 U2.62
CAN_TX2: J3.43 U5.62
CAN_TX3: J4.43 U7.62
CAN_TX4: J5.43 U9.62
CAN_TX5: J6.43 U11.62
CAN_TX6: J7.43 U13.62
CAN_TX7: J8.43 U15.62
D0: J1.10 U1.8
D1: J1.18 U1.9
D2: J2.10 U2.8
D3: J2.18 U2.9
D4: J3.10 U5.8
D5: J3.18 U5.9
D6: J4.10 U7.8
D7: J4.18 U7.9
D8: J5.10 U9.8
D9: J5.18 U9.9
D10: J6.10 U11.8
D11: J6.18 U11.9
D12: J7.10 U13.8
D13: J7.18 U13.9
D14: J8.10 U15.8
D15: J8.18 U15.9
D+: J1.3 R3.1
D+1: J2.3 R10.1
D+2: J3.3 R19.1
D+3: J4.3 R26.1
D+4: J5.3 R33.1
D+5: J6.3 R40.1
D+6: J7.3 R47.1
D+7: J8.3 R54.1
D-: J1.5 R2.1
D-1: J2.5 R9.1
D-2: J3.5 R18.1
D-3: J4.5 R25.1
D-4: J5.5 R32.1
D-5: J6.5 R39.1
D-6: J7.5 R46.1
D-7: J8.5 R53.1
FLASH_!CS: R11.1 U1.11 U3.1
FLASH_!CS1: R7.1 U2.11 U4.1
FLASH_!CS2: R16.1 U5.11 U6.1
FLASH_!CS3: R23.1 U7.11 U8.1
FLASH_!CS4: R30.1 U9.11 U10.1
FLASH_!CS5: R37.1 U11.11 U12.1
FLASH_!CS6: R44.1 U13.11 U14.1
FLASH_!CS7: R51.1 U15.11 U16.1
FLASH_SCK: U1.51 U3.6
FLASH_SCK1: U2.51 U4.6
FLASH_SCK2: U5.51 U6.6
FLASH_SCK3: U7.51 U8.6
FLASH_SCK4: U9.51 U10.6
FLASH_SCK5: U11.51 U12.6
FLASH_SCK6: U13.51 U14.6
FLASH_SCK7: U15.51 U16.6
FLASH_SDI: U1.53 U3.5
FLASH_SDI1: U2.53 U4.5
FLASH_SDI2: U5.53 U6.5
FLASH_SDI3: U7.53 U8.5
FLASH_SDI4: U9.53 U10.5
FLASH_SDI5: U11.53 U12.5
FLASH_SDI6: U13.53 U14.5
FLASH_SDI7: U15.53 U16.5
FLASH_SDO: U1.52 U3.2
FLASH_SDO1: U2.52 U4.2
FLASH_SDO2: U5.52 U6.2
FLASH_SDO3: U7.52 U8.2
FLASH_SDO4: U9.52 U10.2
FLASH_SDO5: U11.52 U12.2
FLASH_SDO6: U13.52 U14.2
FLASH_SDO7: U15.52 U16.2
G0: J1.40 U1.54
G1: J1.42 U1.41
G2: J1.44 U1.14
G3: J1.46 U1.39
G4: J1.48 U1.40
G5: J1.73 U1.2
G6: J1.71 U1.10
G7: J2.73 U2.2
G8: J2.71 U2.10
G9: J2.46 U2.39
G10: J2.48 U2.40
G11: J2.40 U2.54
G12: J2.42 U2.41
G13: J2.44 U2.14
G14: J3.73 U5.2
G15: J3.71 U5.10
G16: J3.46 U5.39
G17: J3.48 U5.40
G18: J3.40 U5.54
G19: J3.42 U5.41
G20: J3.44 U5.14
G21: J4.73 U7.2
G22: J4.71 U7.10
G23: J4.46 U7.39
G24: J4.48 U7.40
G25: J4.40 U7.54
G26: J4.42 U7.41
G27: J4.44 U7.14
G28: J5.73 U9.2
G29: J5.71 U9.10
G30: J5.46 U9.39
G31: J5.48 U9.40
G32: J5.40 U9.54
G33: J5.42 U9.41
G34: J5.44 U9.14
G35: J6.73 U11.2
G36: J6.71 U11.10
G37: J6.46 U11.39
G38: J6.48 U11.40
G39: J6.40 U11.54
G40: J6.42 U11.41
G41: J6.44 U11.14
G42: J7.73 U13.2
G43: J7.71 U13.10
G44: J7.46 U13.39
G45: J7.48 U13.40
G46: J7.40 U13.54
G47: J7.42 U13.41
G48: J7.44 U13.14
G49: J8.73 U15.2
G50: J8.71 U15.10
G51: J8.46 U15.39
G52: J8.48 U15.40
G53: J8.40 U15.54
G54: J8.42 U15.41
G55: J8.44 U15.14
GND: C1.2 C2.2 C3.2 C4.2 C5.2 C6.2 C8.2 C9.2 C10.2 C11.2 C12.2 C13.2 C14.2 C15.2 C20.2 D5.C J1.1 J1.7 J1.33 J1.36 J1.39 J1.45 J1.75 J1.GND1 J1.GND2 J1.GND3 R1.1 U1.12 U1.16 U1.17 U1.18 U1.28 U1.63 U3.4
GND1: C7.2 C16.2 C17.2 C18.2 C19.2 C21.2 C22.2 C23.2 C24.2 C25.2 C26.2 C27.2 C28.2 C29.2 C30.2 D1.C J2.1 J2.7 J2.33 J2.36 J2.39 J2.45 J2.75 J2.GND1 J2.GND2 J2.GND3 R6.1 U2.12 U2.16 U2.17 U2.18 U2.28 U2.63 U4.4
GND2: C31.2 C32.2 C33.2 C34.2 C35.2 C36.2 C37.2 C38.2 C39.2 C40.2 C41.2 C42.2 C43.2 C44.2 C45.2 D2.C J3.1 J3.7 J3.33 J3.36 J3.39 J3.45 J3.75 J3.GND1 J3.GND2 J3.GND3 R15.1 U5.12 U5.16 U5.17 U5.18 U5.28 U5.63 U6.4
GND3: C46.2 C47.2 C48.2 C49.2 C50.2 C51.2 C52.2 C53.2 C54.2 C55.2 C56.2 C57.2 C58.2 C59.2 C60.2 D3.C J4.1 J4.7 J4.33 J4.36 J4.39 J4.45 J4.75 J4.GND1 J4.GND2 J4.GND3 R22.1 U7.12 U7.16 U7.17 U7.18 U7.28 U7.63 U8.4
GND4: C61.2 C62.2 C63.2 C64.2 C65.2 C66.2 C67.2 C68.2 C69.2 C70.2 C71.2 C72.2 C73.2 C74.2 C75.2 D4.C J5.1 J5.7 J5.33 J5.36 J5.39 J5.45 J5.75 J5.GND1 J5.GND2 J5.GND3 R29.1 U9.12 U9.16 U9.17 U9.18 U9.28 U9.63 U10.4
GND5: C76.2 C77.2 C78.2 C79.2 C80.2 C81.2 C82.2 C83.2 C84.2 C85.2 C86.2 C87.2 C88.2 C89.2 C90.2 D6.C J6.1 J6.7 J6.33 J6.36 J6.39 J6.45 J6.75 J6.GND1 J6.GND2 J6.GND3 R36.1 U11.12 U11.16 U11.17 U11.18 U11.28 U11.63 U12.4
GND6: C91.2 C92.2 C93.2 C94.2 C95.2 C96.2 C97.2 C98.2 C99.2 C100.2 C101.2 C102.2 C103.2 C104.2 C105.2 D7.C J7.1 J7.7 J7.33 J7.36 J7.39 J7.45 J7.75 J7.GND1 J7.GND2 J7.GND3 R43.1 U13.12 U13.16 U13.17 U13.18 U13.28 U13.63 U14.4
GND7: C106.2 C107.2 C108.2 C109.2 C110.2 C111.2 C112.2 C113.2 C114.2 C115.2 C116.2 C117.2 C118.2 C119.2 C120.2 D8.C J8.1 J8.7 J8.33 J8.36 J8.39 J8.45 J8.75 J8.GND1 J8.GND2 J8.GND3 R50.1 U15.12 U15.16 U15.17 U15.18 U15.28 U15.63 U16.4
HOST_D+: J1.35 U1.36
HOST_D+1: J2.35 U2.36
HOST_D+2: J3.35 U5.36
HOST_D+3: J4.35 U7.36
HOST_D+4: J5.35 U9.36
HOST_D+5: J6.35 U11.36
HOST_D+6: J7.35 U13.36
HOST_D+7: J8.35 U15.36
HOST_D-: J1.37 U1.35
HOST_D-1: J2.37 U2.35
HOST_D-2: J3.37 U5.35
HOST_D-3: J4.37 U7.35
HOST_D-4: J5.37 U9.35
HOST_D-5: J6.37 U11.35
HOST_D-6: J7.37 U13.35
HOST_D-7: J8.37 U15.35
HOST_ID: J1.8 U1.33
HOST_ID1: J2.8 U2.33
HOST_ID2: J3.8 U5.33
HOST_ID3: J4.8 U7.33
HOST_ID4: J5.8 U9.33
HOST_ID5: J6.8 U11.33
HOST_ID6: J7.8 U13.33
HOST_ID7: J8.8 U15.33
HOST_VBUS: J1.63 U1.34
HOST_VBUS1: J2.63 U2.34
HOST_VBUS2: J3.63 U5.34
HOST_VBUS3: J4.63 U7.34
HOST_VBUS4: J5.63 U9.34
HOST_VBUS5: J6.63 U11.34
HOST_VBUS6: J7.63 U13.34
HOST_VBUS7: J8.63 U15.34
N$1: D5.A R12.1
N$2: R2.2 U1.44
N$3: R3.2 U1.45
N$4: C26.1 U2.3 Y4.P$2
N$5: C4.1 U1.3 Y2.P$2
N$6: C3.1 U1.4 Y2.P$1
N$7: C2.1 U1.6 Y1.3
N$8: C1.1 U1.5 Y1.1
N$9: C25.1 U2.4 Y4.P$1
N$10: C23.1 U2.6 Y3.3
N$11: C7.1 U2.5 Y3.1
N$12: C28.1 U2.47
N$13: C27.1 U2.31
N$14: D1.A R8.1
N$15: R9.2 U2.44
N$16: R10.2 U2.45
N$17: C41.1 U5.3 Y6.P$2
N$18: C40.1 U5.4 Y6.P$1
N$19: C38.1 U5.6 Y5.3
N$20: C31.1 U5.5 Y5.1
N$21: C43.1 U5.47
N$22: C42.1 U5.31
N$23: D2.A R17.1
N$24: R18.2 U5.44
N$25: R19.2 U5.45
N$26: C56.1 U7.3 Y8.P$2
N$27: C55.1 U7.4 Y8.P$1
N$28: C53.1 U7.6 Y7.3
N$29: C46.1 U7.5 Y7.1
N$30: C58.1 U7.47
N$31: C57.1 U7.31
N$32: D3.A R24.1
N$33: R25.2 U7.44
N$34: R26.2 U7.45
N$35: C71.1 U9.3 Y10.P$2
N$36: C70.1 U9.4 Y10.P$1
N$37: C68.1 U9.6 Y9.3
N$38: C61.1 U9.5 Y9.1
N$39: C73.1 U9.47
N$40: C72.1 U9.31
N$41: D4.A R31.1
N$42: R32.2 U9.44
N$43: R33.2 U9.45
N$44: C86.1 U11.3 Y12.P$2
N$45: C6.1 U1.47
N$46: C5.1 U1.31
N$47: C85.1 U11.4 Y12.P$1
N$48: C83.1 U11.6 Y11.3
N$49: C76.1 U11.5 Y11.1
N$50: C88.1 U11.47
N$51: C87.1 U11.31
N$52: D6.A R38.1
N$53: R39.2 U11.44
N$54: R40.2 U11.45
N$55: C101.1 U13.3 Y14.P$2
N$56: C100.1 U13.4 Y14.P$1
N$57: C98.1 U13.6 Y13.3
N$58: C91.1 U13.5 Y13.1
N$59: C103.1 U13.47
N$60: C102.1 U13.31
N$61: D7.A R45.1
N$62: R46.2 U13.44
N$63: R47.2 U13.45
N$64: C116.1 U15.3 Y16.P$2
N$65: C115.1 U15.4 Y16.P$1
N$66: C113.1 U15.6 Y15.3
N$67: C106.1 U15.5 Y15.1
N$68: C118.1 U15.47
N$69: C117.1 U15.31
N$70: D8.A R52.1
N$71: R53.2 U15.44
N$72: R54.2 U15.45
PICO: J1.59 U1.23
PICO1: J2.59 U2.23
PICO2: J3.59 U5.23
PICO3: J4.59 U7.23
PICO4: J5.59 U9.23
PICO5: J6.59 U11.23
PICO6: J7.59 U13.23
PICO7: J8.59 U15.23
POCI: J1.61 U1.22
POCI1: J2.61 U2.22
POCI2: J3.61 U5.22
POCI3: J4.61 U7.22
POCI4: J5.61 U9.22
POCI5: J6.61 U11.22
POCI6: J7.61 U13.22
POCI7: J8.61 U15.22
PWM0: J1.32 U1.37
PWM1: J1.47 U1.38
PWM2: J2.32 U2.37
PWM3: J2.47 U2.38
PWM4: J3.32 U5.37
PWM5: J3.47 U5.38
PWM6: J4.32 U7.37
PWM7: J4.47 U7.38
PWM8: J5.32 U9.37
PWM9: J5.47 U9.38
PWM10: J6.32 U11.37
PWM11: J6.47 U11.38
PWM12: J7.32 U13.37
PWM13: J7.47 U13.38
PWM14: J8.32 U15.37
PWM15: J8.47 U15.38
RX1: J1.19 TP1.1 U1.43
RX2: J2.19 TP5.1 U2.43
RX3: J3.19 TP9.1 U5.43
RX4: J4.19 TP13.1 U7.43
RX5: J5.19 TP17.1 U9.43
RX6: J6.19 TP21.1 U11.43
RX7: J7.19 TP25.1 U13.43
RX8: J8.19 TP29.1 U15.43
SCK: J1.57 U1.21
SCK1: J2.57 U2.21
SCK2: J3.57 U5.21
SCK3: J4.57 U7.21
SCK4: J5.57 U9.21
SCK5: J6.57 U11.21
SCK6: J7.57 U13.21
SCK7: J8.57 U15.21
SCL: J1.14 U1.29
SCL1: J1.53 U1.58
SCL2: J2.14 U2.29
SCL3: J2.53 U2.58
SCL4: J3.14 U5.29
SCL5: J3.53 U5.58
SCL6: J4.14 U7.29
SCL7: J4.53 U7.58
SCL8: J5.14 U9.29
SCL9: J5.53 U9.58
SCL10: J6.14 U11.29
SCL11: J6.53 U11.58
SCL12: J7.14 U13.29
SCL13: J7.53 U13.58
SCL14: J8.14 U15.29
SCL15: J8.53 U15.58
SDA: J1.12 U1.30
SDA1: J1.51 U1.59
SDA2: J2.12 U2.30
SDA3: J2.51 U2.59
SDA4: J3.12 U5.30
SDA5: J3.51 U5.59
SDA6: J4.12 U7.30
SDA7: J4.51 U7.59
SDA8: J5.12 U9.30
SDA9: J5.51 U9.59
SDA10: J6.12 U11.30
SDA11: J6.51 U11.59
SDA12: J7.12 U13.30
SDA13: J7.51 U13.59
SDA14: J8.12 U15.30
SDA15: J8.51 U15.59
STAT: R12.2 U1.50
STAT1: R8.2 U2.50
STAT2: R17.2 U5.50
STAT3: R24.2 U7.50
STAT4: R31.2 U9.50
STAT5: R38.2 U11.50
STAT6: R45.2 U13.50
STAT7: R52.2 U15.50
SWCLK: J1.21 U1.49
SWCLK1: J2.21 U2.49
SWCLK2: J3.21 U5.49
SWCLK3: J4.21 U7.49
SWCLK4: J5.21 U9.49
SWCLK5: J6.21 U11.49
SWCLK6: J7.21 U13.49
SWCLK7: J8.21 U15.49
SWDIO: J1.23 U1.46
SWDIO1: J2.23 U2.46
SWDIO2: J3.23 U5.46
SWDIO3: J4.23 U7.46
SWDIO4: J5.23 U9.46
SWDIO5: J6.23 U11.46
SWDIO6: J7.23 U13.46
SWDIO7: J8.23 U15.46
TX1: J1.17 TP2.1 U1.42
TX2: J2.17 TP6.1 U2.42
TX3: J3.17 TP10.1 U5.42
TX4: J4.17 TP14.1 U7.42
TX5: J5.17 TP18.1 U9.42
TX6: J6.17 TP22.1 U11.42
TX7: J7.17 TP26.1 U13.42
TX8: J8.17 TP30.1 U15.42

## Tracks (layer width: path | path; a pad name or v marks a point on that pad's centre or on a via)
3.3V  (via drill 0.3)  (5 unrouted)
  Top 0.152: 10.08,7.05 R4.2 10.74,7.05 | U1.19 v15.19,7.48 | U1.13 11.64,9.83 11.31,9.5 11.31,8.29 10.74,7.72 10.74,7.05 | C14.1 | v8.71,4.2 8.8,4.29 10.3,4.29 10.74,4.73 10.74,6.1 | C14.1 14.09,20.61 v14.09,21.35 | U1.32 21.69,5.63 21.79,5.53 v22.31,5.53 22.71,5.53 22.86,5.68 C12.1 | C13.1 25.71,16.25 v25.3,15.84 24.45,15.84 24.44,15.83 U1.48 22.69,15.83 22.05,15.2 v22.05,12.9 v22.06,12.9 | C14.1 C11.1 14.19,19.57 U1.64 | 10.1,6.05 C10.1 | C8.1 C9.1 C10.1 | 10.74,6.1 10.74,7.05 | C10.1 10,6.1 10.74,6.1
  Bottom 0.152: J1.74 8.86,4.05 v8.71,4.2 | J1.2 26.86,4.18 27.49,4.81 v27.97,4.81 | v15.19,7.48 15.18,7.49 R11.2 15.18,8.85 15.01,9.02 15.01,13.42 14.79,13.63 U3.3 | R5.2 25.3,16.27 v25.3,15.84 25.61,15.53 Q1.2 | U3.8 20.6,11.1 20.82,11.31 20.82,12.16 | C20.1 23.12,11.43 22.86,11.7 22.86,12.5 22.46,12.9 v22.06,12.9 21.56,12.9 20.82,12.16 | 20.82,12.16 20.63,12.16 20.43,12.37 U3.7
  pour Route15 (isolate 0.152): 6.86,0 6.86,22 28.86,22 28.86,0
3.3V1  (via drill 0.3)  (5 unrouted)
  Top 0.152: 32.59,7.05 R13.2 33.24,7.05 | U2.19 v37.7,7.48 | U2.13 34.15,9.83 33.82,9.5 33.82,8.29 33.24,7.72 33.24,7.05 | 36.6,20.58 C21.1 | v31.21,4.2 31.3,4.29 32.8,4.29 33.24,4.73 33.24,6.1 | C21.1 36.59,20.61 v36.59,21.35 | U2.32 44.2,5.63 44.29,5.53 v44.81,5.53 45.21,5.53 45.36,5.68 C18.1 | C19.1 48.21,16.25 v47.8,15.84 46.95,15.84 46.95,15.83 U2.48 45.2,15.83 44.56,15.2 v44.56,12.9 | C21.1 C17.1 36.7,19.57 U2.64 | 32.6,6.05 C16.1 | C29.1 C30.1 32.49,6.06 C16.1 | 33.24,6.1 33.24,7.05 | C16.1 32.5,6.1 33.24,6.1
  Bottom 0.152: J2.74 31.37,4.05 v31.22,4.2 v31.21,4.2 | J2.2 49.36,4.18 49.99,4.81 v50.47,4.81 | v37.7,7.48 37.69,7.49 R7.2 37.69,8.85 37.52,9.02 37.52,13.42 37.3,13.63 U4.3 | R14.2 47.8,16.27 v47.8,15.84 48.11,15.53 Q2.2 | U4.8 43.11,11.1 43.33,11.31 43.33,12.16 | C24.1 45.63,11.43 45.36,11.7 45.36,12.5 44.96,12.9 v44.56,12.9 44.06,12.9 43.33,12.16 | 43.33,12.16 43.14,12.16 42.94,12.37 U4.7
  pour Route15 (isolate 0.152): 29.36,0 29.36,22 51.36,22 51.36,0
3.3V2  (via drill 0.3)  (5 unrouted)
  Top 0.152: 55.09,7.05 R20.2 55.75,7.05 | U5.19 v60.2,7.48 | U5.13 56.66,9.83 56.33,9.5 56.33,8.29 55.75,7.72 55.75,7.05 | 59.11,20.58 C36.1 | v53.72,4.2 53.81,4.29 55.31,4.29 55.75,4.73 55.75,6.1 | C36.1 59.1,20.61 v59.1,21.35 | U5.32 66.7,5.63 66.8,5.53 v67.32,5.53 67.72,5.53 67.87,5.68 C34.1 | C35.1 70.72,16.25 v70.31,15.84 69.46,15.84 69.45,15.83 U5.48 67.7,15.83 67.07,15.2 v67.07,12.9 | C36.1 C33.1 59.2,19.57 U5.64 | 55.11,6.05 C32.1 | C44.1 C45.1 55,6.06 C32.1 | 55.75,6.1 55.75,7.05 | C32.1 55.01,6.1 55.75,6.1
  Bottom 0.152: J3.74 53.87,4.05 v53.73,4.2 v53.72,4.2 | J3.2 71.87,4.18 72.5,4.81 v72.98,4.81 | v60.2,7.48 60.19,7.49 R16.2 60.19,8.85 60.02,9.02 60.02,13.42 59.81,13.63 U6.3 | R21.2 70.31,16.27 v70.31,15.84 70.62,15.53 Q3.2 | U6.8 65.62,11.1 65.84,11.31 65.84,12.16 | C39.1 68.14,11.43 67.87,11.7 67.87,12.5 67.47,12.9 v67.07,12.9 66.57,12.9 65.84,12.16 | 65.84,12.16 65.65,12.16 65.45,12.37 U6.7
  pour Route15 (isolate 0.152): 51.87,0 51.87,22 73.87,22 73.87,0
3.3V3  (via drill 0.3)  (5 unrouted)
  Top 0.152: 77.6,7.05 R27.2 78.26,7.05 | U7.19 v82.71,7.48 | U7.13 79.16,9.83 78.83,9.5 78.83,8.29 78.26,7.72 78.26,7.05 | C51.1 | v76.23,4.2 76.32,4.29 77.82,4.29 78.26,4.73 78.26,6.1 | C51.1 81.61,20.61 v81.61,21.35 | U7.32 89.21,5.63 89.31,5.53 v89.83,5.53 90.23,5.53 90.38,5.68 C49.1 | C50.1 93.23,16.25 v92.82,15.84 91.97,15.84 91.96,15.83 U7.48 90.21,15.83 89.58,15.2 v89.58,12.9 | C51.1 C48.1 81.71,19.57 U7.64 | 77.62,6.05 C47.1 | C59.1 C60.1 C47.1 | 78.26,6.1 78.26,7.05 | C47.1 77.52,6.1 78.26,6.1
  Bottom 0.152: J4.74 76.38,4.05 v76.24,4.2 v76.23,4.2 | J4.2 94.38,4.18 95.01,4.81 v95.49,4.81 | v82.71,7.48 82.7,7.49 R23.2 82.7,8.85 82.53,9.02 82.53,13.42 82.32,13.63 U8.3 | R28.2 92.82,16.27 v92.82,15.84 93.13,15.53 Q4.2 | U8.8 88.13,11.1 88.35,11.31 88.35,12.16 | C54.1 90.65,11.43 90.38,11.7 90.38,12.5 89.98,12.9 v89.58,12.9 89.08,12.9 88.35,12.16 | 88.35,12.16 88.16,12.16 87.96,12.37 U8.7
  pour Route15 (isolate 0.152): 74.38,0 74.38,22 96.38,22 96.38,0
3.3V4  (via drill 0.3)  (5 unrouted)
  Top 0.152: 25.64,62.8 R34.2 24.98,62.8 | U9.19 v20.53,62.37 | U9.13 24.07,60.02 24.4,60.35 24.4,61.56 24.98,62.13 24.98,62.8 | C66.1 | v27.01,65.65 26.92,65.56 25.42,65.56 24.98,65.12 24.98,63.75 | C66.1 21.63,49.24 v21.63,48.5 | U9.32 14.03,64.22 13.93,64.32 v13.41,64.32 13.01,64.32 12.86,64.17 C64.1 | C65.1 10.01,53.6 v10.42,54.01 11.27,54.01 11.28,54.02 U9.48 13.03,54.02 13.66,54.65 v13.66,56.95 | C66.1 C63.1 21.53,50.28 U9.64 | 25.62,63.8 C62.1 | C74.1 C75.1 C62.1 | 24.98,63.75 24.98,62.8 | C62.1 25.72,63.75 24.98,63.75
  Bottom 0.152: J5.74 26.86,65.8 v27,65.65 v27.01,65.65 | J5.2 8.86,65.67 8.23,65.04 v7.75,65.04 | v20.53,62.37 20.54,62.36 R30.2 20.54,61 20.71,60.83 20.71,56.43 20.92,56.22 U10.3 | R35.2 10.42,53.58 v10.42,54.01 10.11,54.32 Q5.2 | U10.8 15.11,58.76 14.89,58.53 14.89,57.69 | C69.1 12.59,58.42 12.86,58.15 12.86,57.35 13.26,56.95 v13.66,56.95 14.16,56.95 14.89,57.69 | 14.89,57.69 15.08,57.69 15.28,57.48 U10.7
  pour Route15 (isolate 0.152): 28.86,69.85 28.86,47.85 6.86,47.85 6.86,69.85
3.3V5  (via drill 0.3)  (5 unrouted)
  Top 0.152: 48.15,62.8 R41.2 47.49,62.8 | U11.19 v43.04,62.37 | U11.13 46.58,60.02 46.91,60.35 46.91,61.56 47.49,62.13 47.49,62.8 | C81.1 | v49.52,65.65 49.43,65.56 47.93,65.56 47.49,65.12 47.49,63.75 | C81.1 44.14,49.24 v44.14,48.5 | U11.32 36.54,64.22 36.44,64.32 v35.92,64.32 35.52,64.32 35.37,64.17 C79.1 | C80.1 32.52,53.6 v32.93,54.01 33.78,54.01 33.79,54.02 U11.48 35.54,54.02 36.17,54.65 v36.17,56.95 | C81.1 C78.1 44.04,50.28 U11.64 | 48.13,63.8 C77.1 | C89.1 C90.1 C77.1 | 47.49,63.75 47.49,62.8 | C77.1 48.23,63.75 47.49,63.75
  Bottom 0.152: J6.74 49.37,65.8 v49.51,65.65 v49.52,65.65 | J6.2 31.37,65.67 30.74,65.04 v30.26,65.04 | v43.04,62.37 43.05,62.36 R37.2 43.05,61 43.22,60.83 43.22,56.43 43.43,56.22 U12.3 | R42.2 32.93,53.58 v32.93,54.01 32.62,54.32 Q6.2 | U12.8 37.62,58.76 37.4,58.53 37.4,57.69 | C84.1 35.1,58.42 35.37,58.15 35.37,57.35 35.77,56.95 v36.17,56.95 36.67,56.95 37.4,57.69 | 37.4,57.69 37.59,57.69 37.79,57.48 U12.7
  pour Route15 (isolate 0.152): 51.37,69.85 51.37,47.85 29.37,47.85 29.37,69.85
3.3V6  (via drill 0.3)  (5 unrouted)
  Top 0.152: 70.65,62.8 R48.2 69.99,62.8 | U13.19 v65.54,62.37 | U13.13 69.09,60.02 69.42,60.35 69.42,61.56 69.99,62.13 69.99,62.8 | C96.1 | v72.02,65.65 71.93,65.56 70.43,65.56 69.99,65.12 69.99,63.75 | C96.1 66.64,49.24 v66.64,48.5 | U13.32 59.04,64.22 58.94,64.32 v58.42,64.32 58.02,64.32 57.87,64.17 C94.1 | C95.1 55.02,53.6 v55.43,54.01 56.28,54.01 56.29,54.02 U13.48 58.04,54.02 58.68,54.65 v58.68,56.95 v58.67,56.95 | C96.1 C93.1 66.54,50.28 U13.64 | 70.63,63.8 C92.1 | C104.1 C105.1 C92.1 | 69.99,63.75 69.99,62.8 | C92.1 70.73,63.75 69.99,63.75
  Bottom 0.152: J7.74 71.87,65.8 v72.02,65.65 | J7.2 53.87,65.67 53.24,65.04 v52.76,65.04 | v65.54,62.37 65.55,62.36 R44.2 65.55,61 65.72,60.83 65.72,56.43 65.94,56.22 U14.3 | R49.2 55.43,53.58 v55.43,54.01 55.12,54.32 Q7.2 | U14.8 60.13,58.76 59.91,58.53 59.91,57.69 | C99.1 57.61,58.42 57.87,58.15 57.87,57.35 58.27,56.95 v58.67,56.95 59.17,56.95 59.91,57.69 | 59.91,57.69 60.1,57.69 60.3,57.48 U14.7
  pour Route15 (isolate 0.152): 73.87,69.85 73.87,47.85 51.87,47.85 51.87,69.85
3.3V7  (via drill 0.3)  (5 unrouted)
  Top 0.152: 93.16,62.8 R55.2 92.5,62.8 | U15.19 v88.05,62.37 | U15.13 91.6,60.02 91.93,60.35 91.93,61.56 92.5,62.13 92.5,62.8 | 89.14,49.27 C111.1 | v94.53,65.65 94.44,65.56 92.94,65.56 92.5,65.12 92.5,63.75 | C111.1 89.15,49.24 v89.15,48.5 | U15.32 81.55,64.22 81.45,64.32 v80.93,64.32 80.53,64.32 80.38,64.17 C109.1 | C110.1 77.53,53.6 v77.94,54.01 78.79,54.01 78.8,54.02 U15.48 80.55,54.02 81.19,54.65 v81.19,56.95 v81.18,56.95 | C111.1 C108.1 89.05,50.28 U15.64 | 93.14,63.8 C107.1 | C119.1 C120.1 93.25,63.79 C107.1 | 92.5,63.75 92.5,62.8 | C107.1 93.24,63.75 92.5,63.75
  Bottom 0.152: J8.74 94.38,65.8 v94.53,65.65 | J8.2 76.38,65.67 75.75,65.04 v75.27,65.04 | v88.05,62.37 88.06,62.36 R51.2 88.06,61 88.23,60.83 88.23,56.43 88.45,56.22 U16.3 | R56.2 77.94,53.58 v77.94,54.01 77.63,54.32 Q8.2 | U16.8 82.64,58.76 82.42,58.53 82.42,57.69 | C114.1 80.12,58.42 80.38,58.15 80.38,57.35 80.78,56.95 v81.18,56.95 81.68,56.95 82.42,57.69 | 82.42,57.69 82.61,57.69 82.81,57.48 U16.7
  pour Route15 (isolate 0.152): 96.38,69.85 96.38,47.85 74.38,47.85 74.38,69.85
!BOOT  (via drill 0.3)
  Top 0.152: J1.11 24.61,2.95 25.76,4.1 25.76,5.07 v26.74,6.05
  Route15 0.152: v26.74,6.05 27.43,6.74 v27.43,10.77
  Bottom 0.152: R5.1 24.76,15.98 Q1.1 24.31,14.85 24.68,14.48 26.88,14.48 27.43,13.93 v27.43,10.77
!BOOT1  (via drill 0.3)
  Top 0.152: J2.11 47.11,2.95 48.26,4.1 48.26,5.07 v49.25,6.05
  Route15 0.152: v49.25,6.05 49.93,6.74 v49.93,10.77
  Bottom 0.152: R14.1 47.26,15.98 Q2.1 46.81,14.85 47.18,14.48 49.38,14.48 49.93,13.93 v49.93,10.77
!BOOT2  (via drill 0.3)
  Top 0.152: J3.11 69.62,2.95 70.77,4.1 70.77,5.07 v71.76,6.05
  Route15 0.152: v71.76,6.05 72.44,6.74 v72.44,10.77
  Bottom 0.152: R21.1 69.77,15.98 Q3.1 69.32,14.85 69.69,14.48 71.89,14.48 72.44,13.93 v72.44,10.77
!BOOT3  (via drill 0.3)
  Top 0.152: J4.11 92.13,2.95 93.28,4.1 93.28,5.07 v94.27,6.05
  Route15 0.152: v94.27,6.05 94.95,6.74 v94.95,10.77
  Bottom 0.152: R28.1 92.28,15.98 Q4.1 91.83,14.85 92.2,14.48 94.4,14.48 94.95,13.93 v94.95,10.77
!BOOT4  (via drill 0.3)
  Top 0.152: J5.11 11.11,66.9 9.96,65.75 9.96,64.78 v8.97,63.8
  Route15 0.152: v8.97,63.8 8.29,63.11 v8.29,59.08
  Bottom 0.152: R35.1 10.96,53.87 Q5.1 11.41,55 11.04,55.37 8.84,55.37 8.29,55.92 v8.29,59.08
!BOOT5  (via drill 0.3)
  Top 0.152: J6.11 33.62,66.9 32.47,65.75 32.47,64.78 v31.48,63.8
  Route15 0.152: v31.48,63.8 30.8,63.11 v30.8,59.08
  Bottom 0.152: R42.1 33.47,53.87 Q6.1 33.92,55 33.55,55.37 31.35,55.37 30.8,55.92 v30.8,59.08
!BOOT6  (via drill 0.3)
  Top 0.152: J7.11 56.12,66.9 54.97,65.75 54.97,64.78 v53.99,63.8
  Route15 0.152: v53.99,63.8 53.3,63.11 v53.3,59.08
  Bottom 0.152: R49.1 55.97,53.87 Q7.1 56.42,55 56.06,55.37 53.86,55.37 53.3,55.92 v53.3,59.08
!BOOT7  (via drill 0.3)
  Top 0.152: J8.11 78.63,66.9 77.48,65.75 77.48,64.78 v76.5,63.8
  Route15 0.152: v76.5,63.8 75.81,63.11 v75.81,59.08
  Bottom 0.152: R56.1 78.48,53.87 Q8.1 78.93,55 78.57,55.37 76.37,55.37 75.81,55.92 v75.81,59.08
!CS
  Top 0.152: U1.24 17.69,5.75 17.15,5.21 13.57,5.21 12.65,4.29 12.65,3.07 13.61,2.11 J1.55
!CS1
  Top 0.152: U2.24 40.2,5.75 39.66,5.21 36.08,5.21 35.16,4.29 35.16,3.07 36.12,2.11 J2.55
!CS2
  Top 0.152: U5.24 62.7,5.75 62.16,5.21 58.58,5.21 57.67,4.29 57.67,3.07 58.62,2.11 J3.55
!CS3
  Top 0.152: U7.24 85.21,5.75 84.67,5.21 81.09,5.21 80.17,4.29 80.17,3.07 81.13,2.11 J4.55
!CS4
  Top 0.152: U9.24 18.03,64.1 18.57,64.64 22.15,64.64 23.06,65.56 23.06,66.78 22.11,67.74 J5.55
!CS5
  Top 0.152: U11.24 40.54,64.1 41.08,64.64 44.66,64.64 45.57,65.56 45.57,66.78 44.62,67.74 J6.55
!CS6
  Top 0.152: U13.24 63.04,64.1 63.58,64.64 67.16,64.64 68.08,65.56 68.08,66.78 67.12,67.74 J7.55
!CS7
  Top 0.152: U15.24 85.55,64.1 86.09,64.64 89.67,64.64 90.59,65.56 90.59,66.78 89.63,67.74 J8.55
!INT  (via drill 0.3)
  Top 0.152: U1.27 19.19,7.13 19.78,7.73 v19.78,9.48
  Bottom 0.152: J1.16 23.36,7.17 22.36,8.16 21.09,8.16 v19.78,9.48
!INT1  (via drill 0.3)
  Top 0.152: U2.27 41.7,7.13 42.29,7.73 v42.29,9.48
  Bottom 0.152: J2.16 45.86,7.17 44.87,8.16 43.6,8.16 v42.29,9.48
!INT2  (via drill 0.3)
  Top 0.152: U5.27 64.2,7.13 64.8,7.73 v64.8,9.48
  Bottom 0.152: J3.16 68.37,7.17 67.38,8.16 66.11,8.16 v64.8,9.48
!INT3  (via drill 0.3)
  Top 0.152: U7.27 86.71,7.13 87.3,7.73 v87.3,9.48
  Bottom 0.152: J4.16 90.88,7.17 89.88,8.16 88.62,8.16 v87.3,9.48
!INT4  (via drill 0.3)
  Top 0.152: U9.27 16.53,62.72 15.93,62.12 v15.93,60.37
  Bottom 0.152: J5.16 12.36,62.68 13.36,61.69 14.62,61.69 v15.93,60.37
!INT5  (via drill 0.3)
  Top 0.152: U11.27 39.04,62.72 38.44,62.12 v38.44,60.37
  Bottom 0.152: J6.16 34.87,62.68 35.87,61.69 37.13,61.69 v38.44,60.37
!INT6  (via drill 0.3)
  Top 0.152: U13.27 61.54,62.72 60.95,62.12 v60.95,60.37
  Bottom 0.152: J7.16 57.37,62.68 58.37,61.69 59.64,61.69 v60.95,60.37
!INT7  (via drill 0.3)
  Top 0.152: U15.27 84.05,62.72 83.46,62.12 v83.46,60.37
  Bottom 0.152: J8.16 79.88,62.68 80.88,61.69 82.15,61.69 v83.46,60.37
!RESET  (via drill 0.3)
  Top 0.152: C15.1 R4.1 10.59,8.05 10.93,8.39 10.93,11.63 11.29,11.99 11.29,12.54 11.58,12.83 U1.7 12.74,12.83 13.22,13.31 v13.22,14.27
  Route2 0.152: v13.22,14.27 19.6,14.27 21.03,15.7 22.82,15.7 23.19,15.33 25.43,15.33 26.76,14 26.76,9.6 TP4.1
  Bottom 0.152: TP4.1 26.16,2.93 25.86,2.63 J1.6
!RESET1  (via drill 0.3)
  Top 0.152: C22.1 32.48,8.06 R13.1 33.09,8.05 33.44,8.39 33.44,11.63 33.8,11.99 33.8,12.54 34.09,12.83 U2.7 35.25,12.83 35.73,13.31 v35.73,14.27
  Route2 0.152: v35.73,14.27 42.11,14.27 43.54,15.7 45.33,15.7 45.7,15.33 47.93,15.33 49.26,14 49.26,9.6 TP8.1
  Bottom 0.152: TP8.1 48.66,2.93 48.36,2.63 J2.6
!RESET2  (via drill 0.3)
  Top 0.152: C37.1 54.99,8.06 R20.1 55.6,8.05 55.94,8.39 55.94,11.63 56.31,11.99 56.31,12.54 56.6,12.83 U5.7 57.76,12.83 58.23,13.31 v58.23,14.27
  Route2 0.152: v58.23,14.27 64.62,14.27 66.05,15.7 67.84,15.7 68.2,15.33 70.44,15.33 71.77,14 71.77,9.6 TP12.1
  Bottom 0.152: TP12.1 71.17,2.93 70.87,2.63 J3.6
!RESET3  (via drill 0.3)
  Top 0.152: C52.1 R27.1 78.11,8.05 78.45,8.39 78.45,11.63 78.81,11.99 78.81,12.54 79.11,12.83 U7.7 80.26,12.83 80.74,13.31 v80.74,14.27
  Route2 0.152: v80.74,14.27 87.12,14.27 88.55,15.7 90.34,15.7 90.71,15.33 92.95,15.33 94.28,14 94.28,9.6 TP16.1
  Bottom 0.152: TP16.1 93.68,2.93 93.38,2.63 J4.6
!RESET4  (via drill 0.3)